# Altium PCB slave.PcbDoc (part 1 of 8)
Units mm, origin at the board's own origin, x right, y up, seen from the top; angles counter-clockwise.
Board outline 160 x 100 mm, 6 copper layers (Top, FUSED_VBAT-, Signals1, Signals2, SUPPLY, Bottom), stack 1.67 mm thick; 582 components, 375 nets, 1615 pads, 3043 vias.
Unrouted connection lines stored in the file: 1.
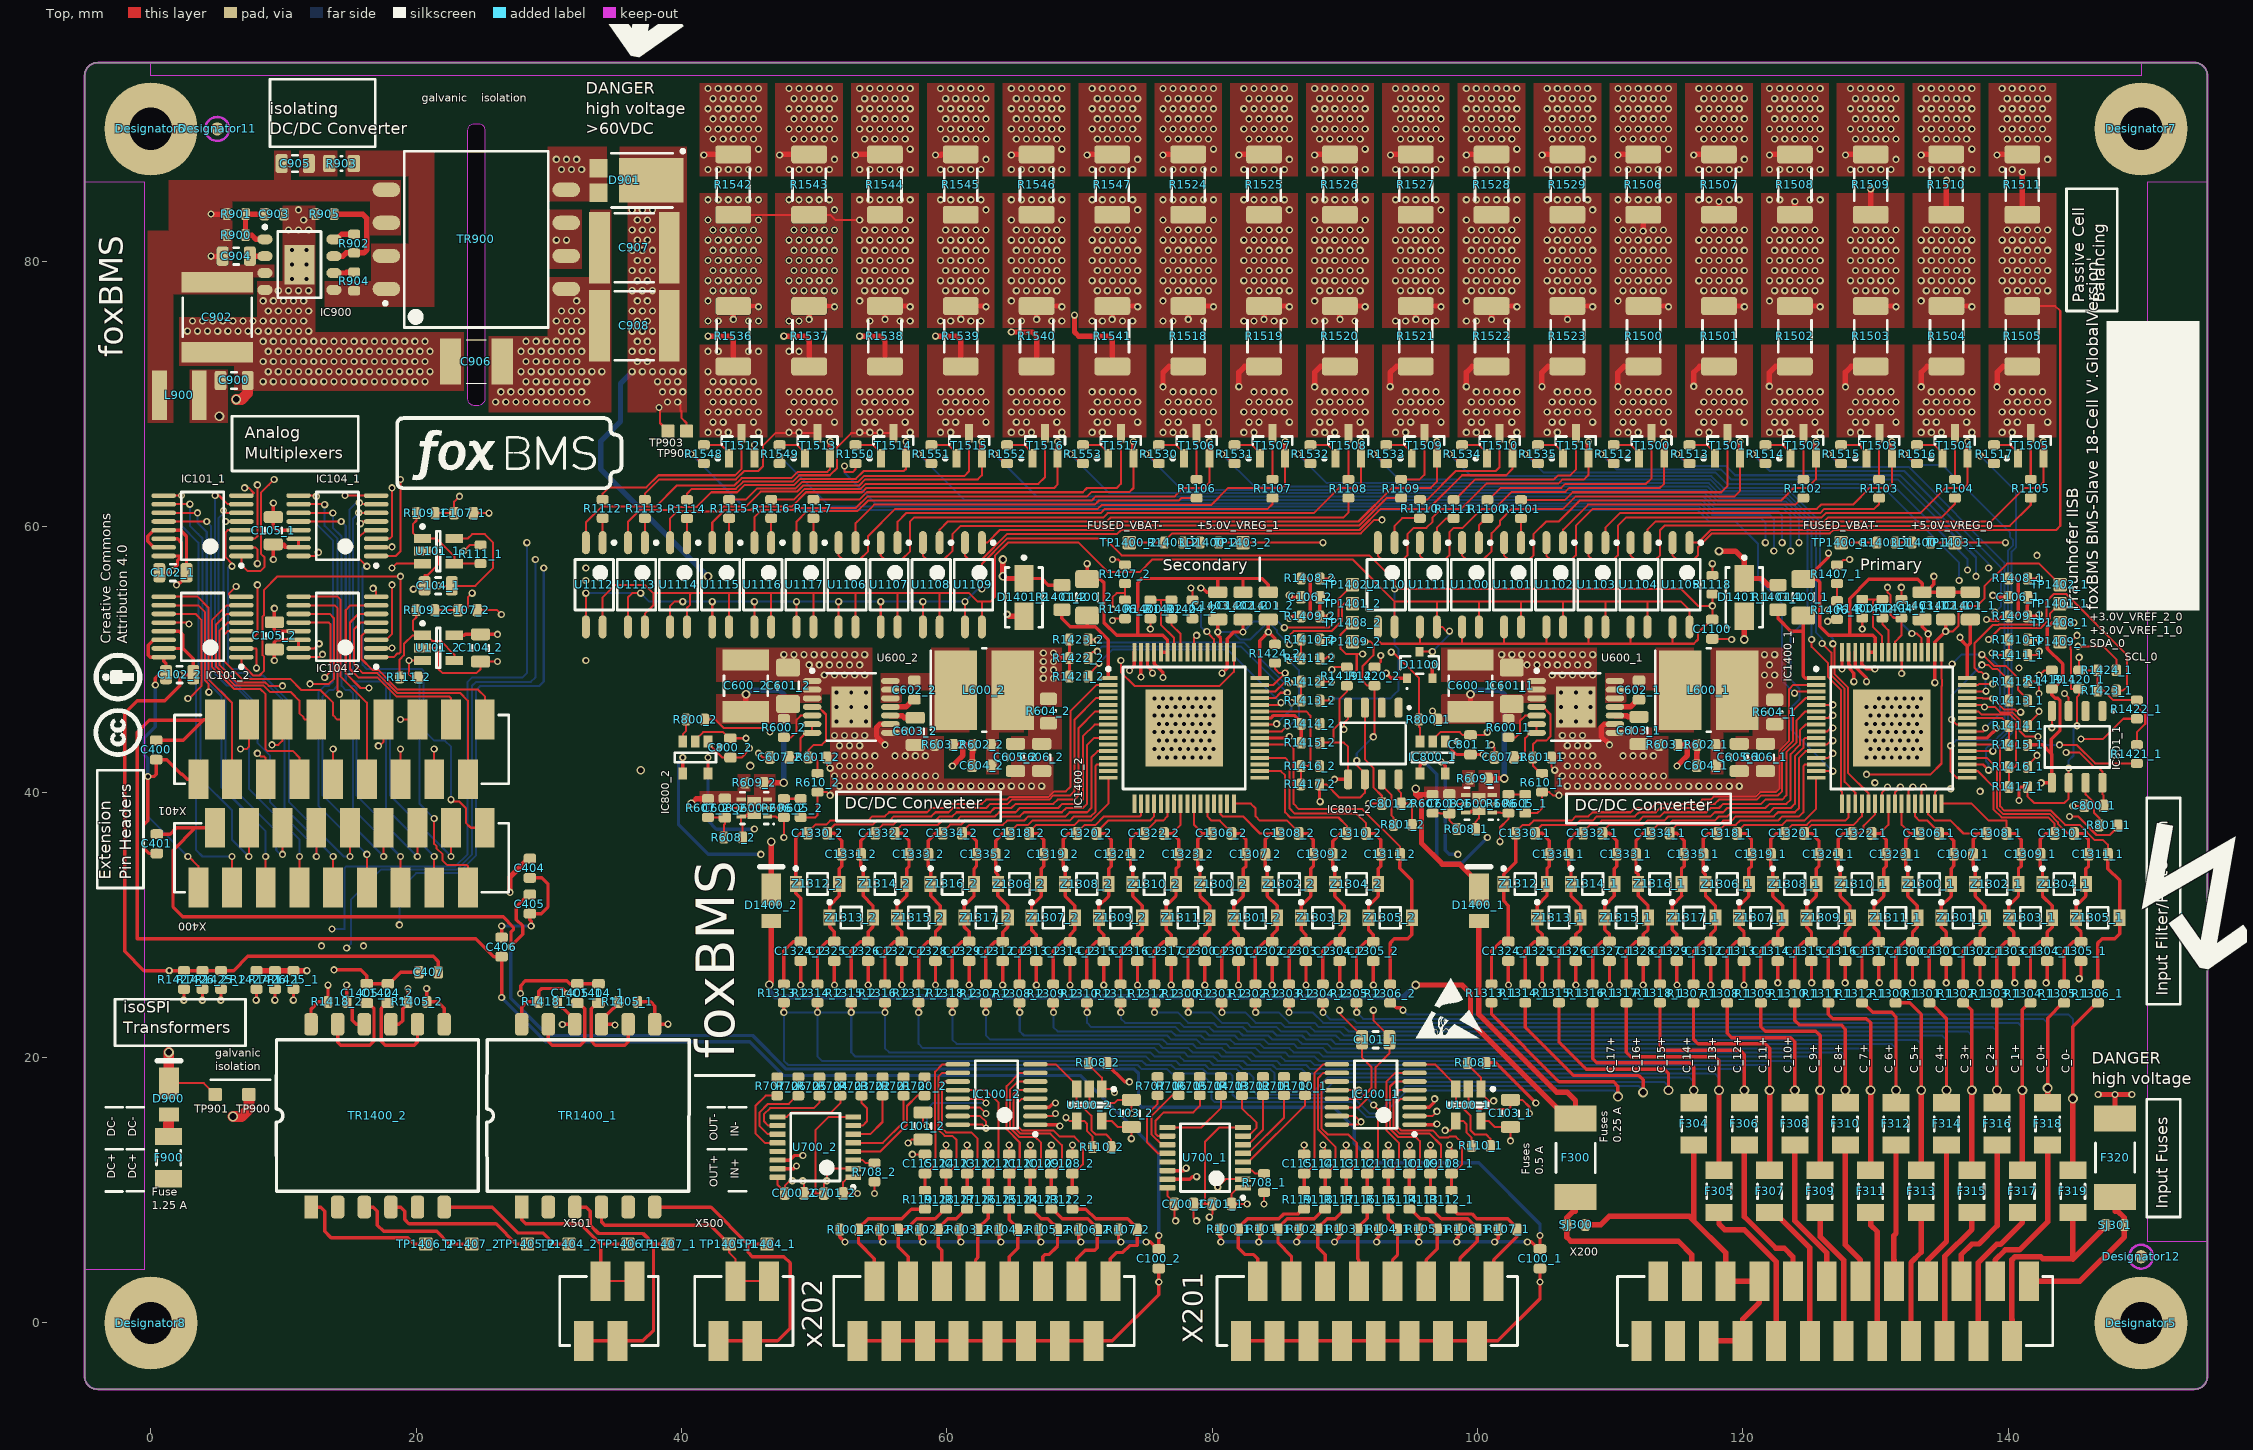
[diagram p0: Top view]
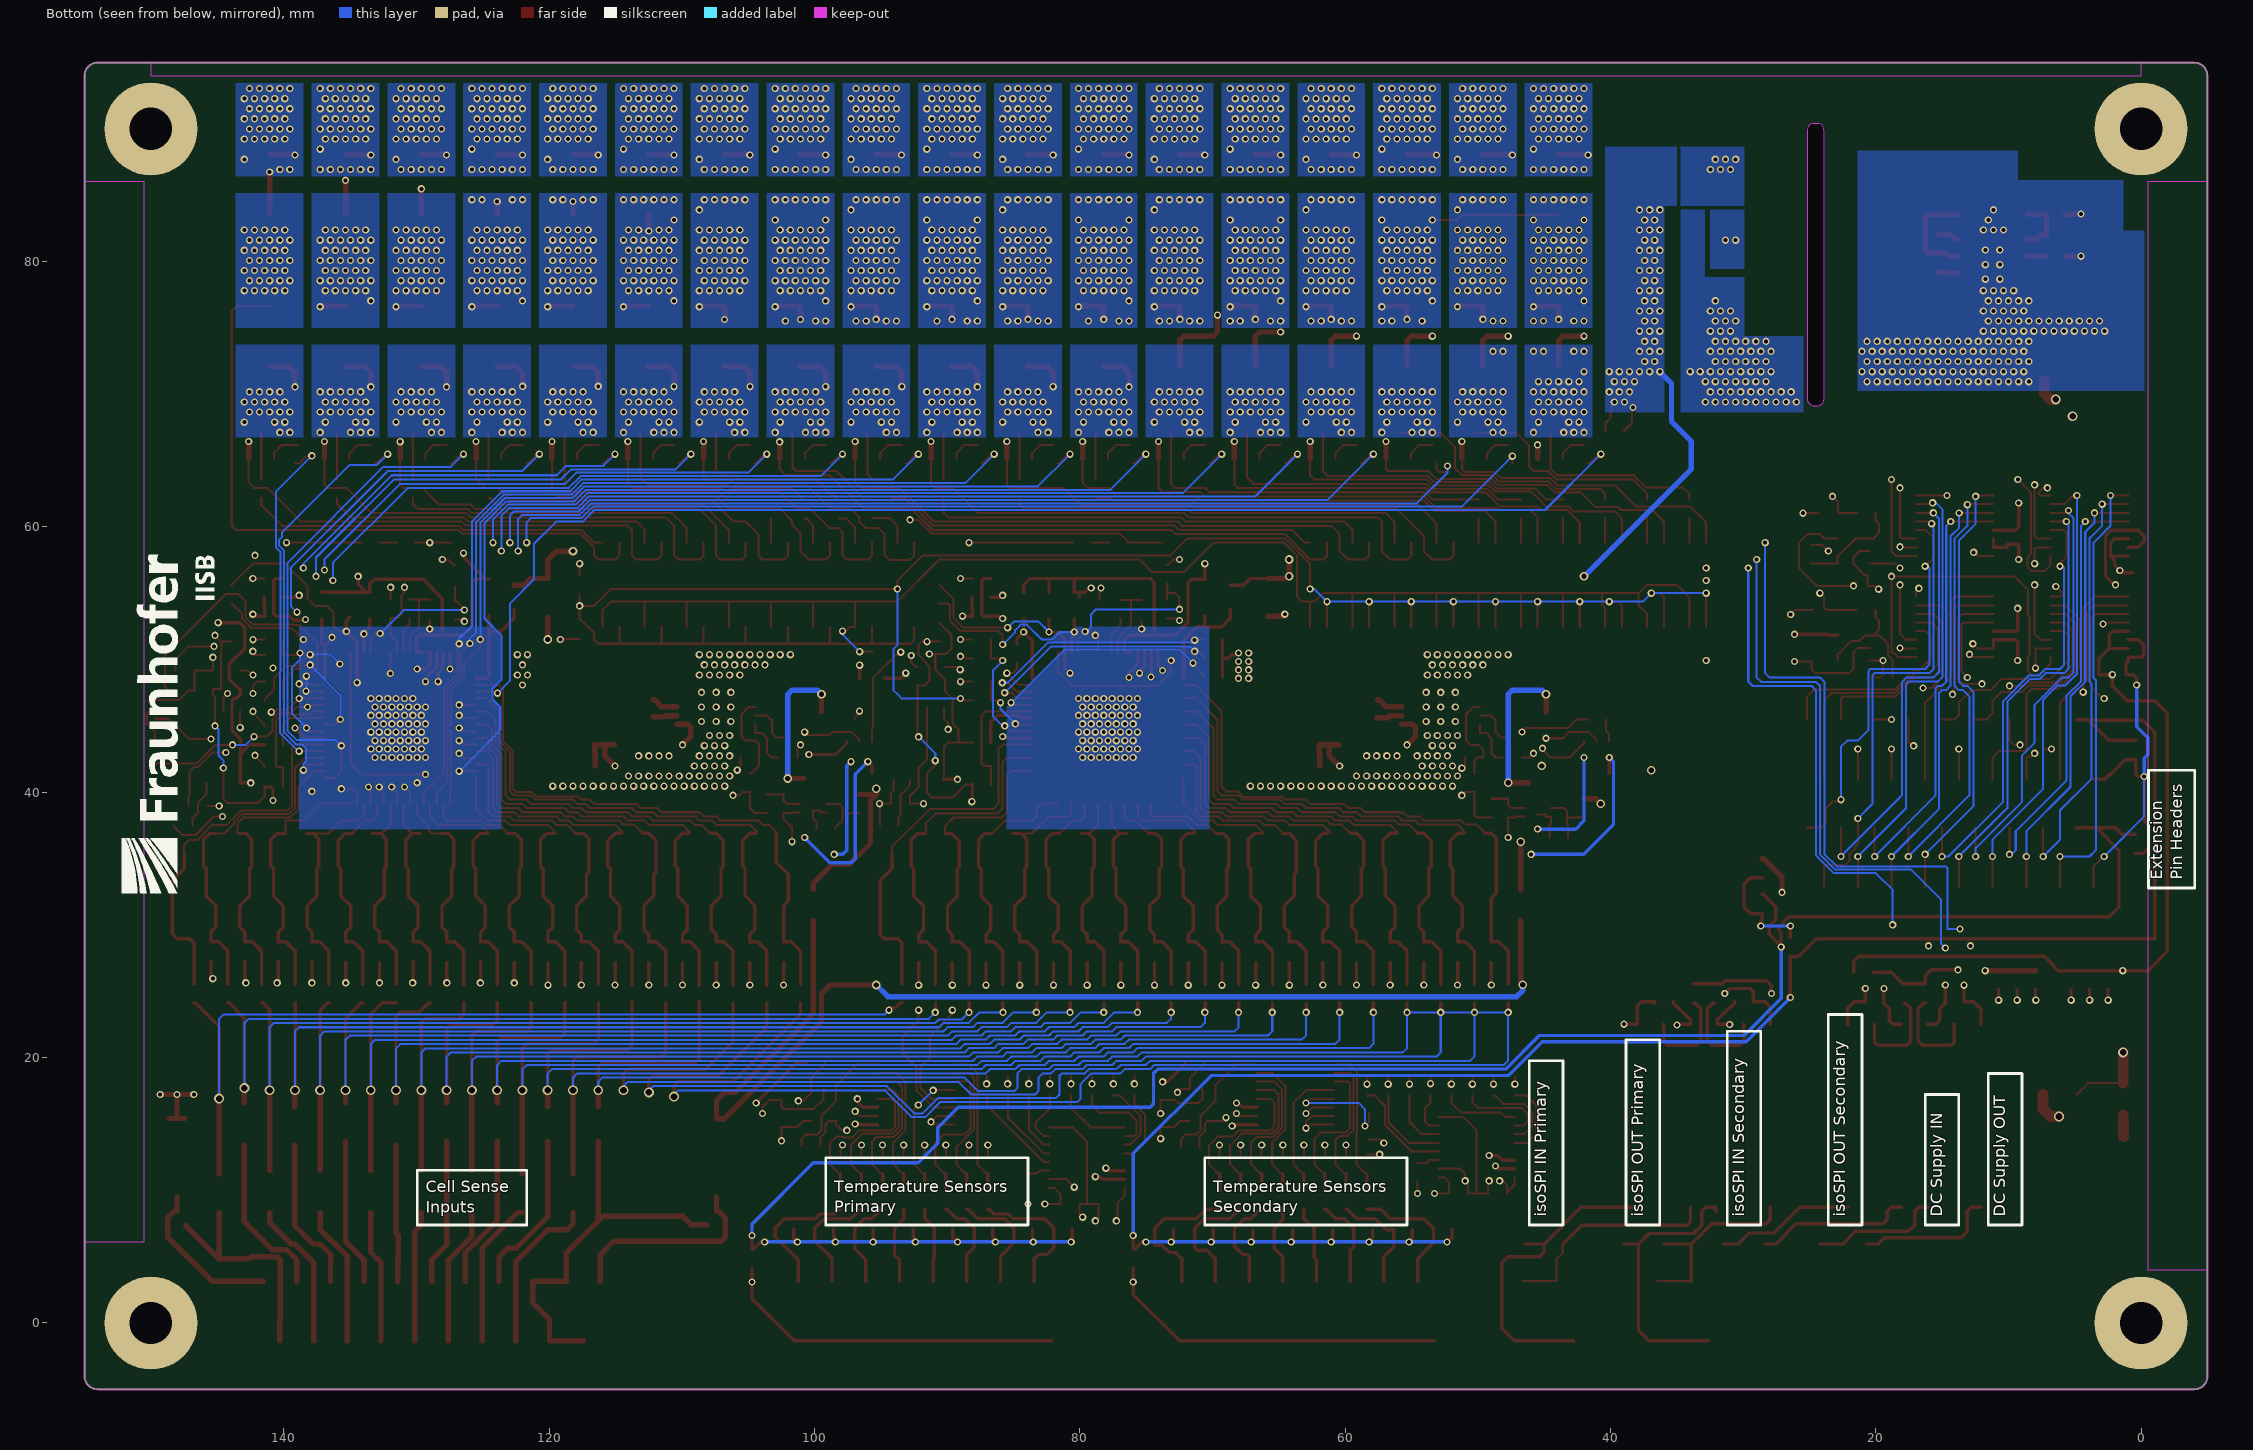
[diagram p1: Bottom view, seen from below]
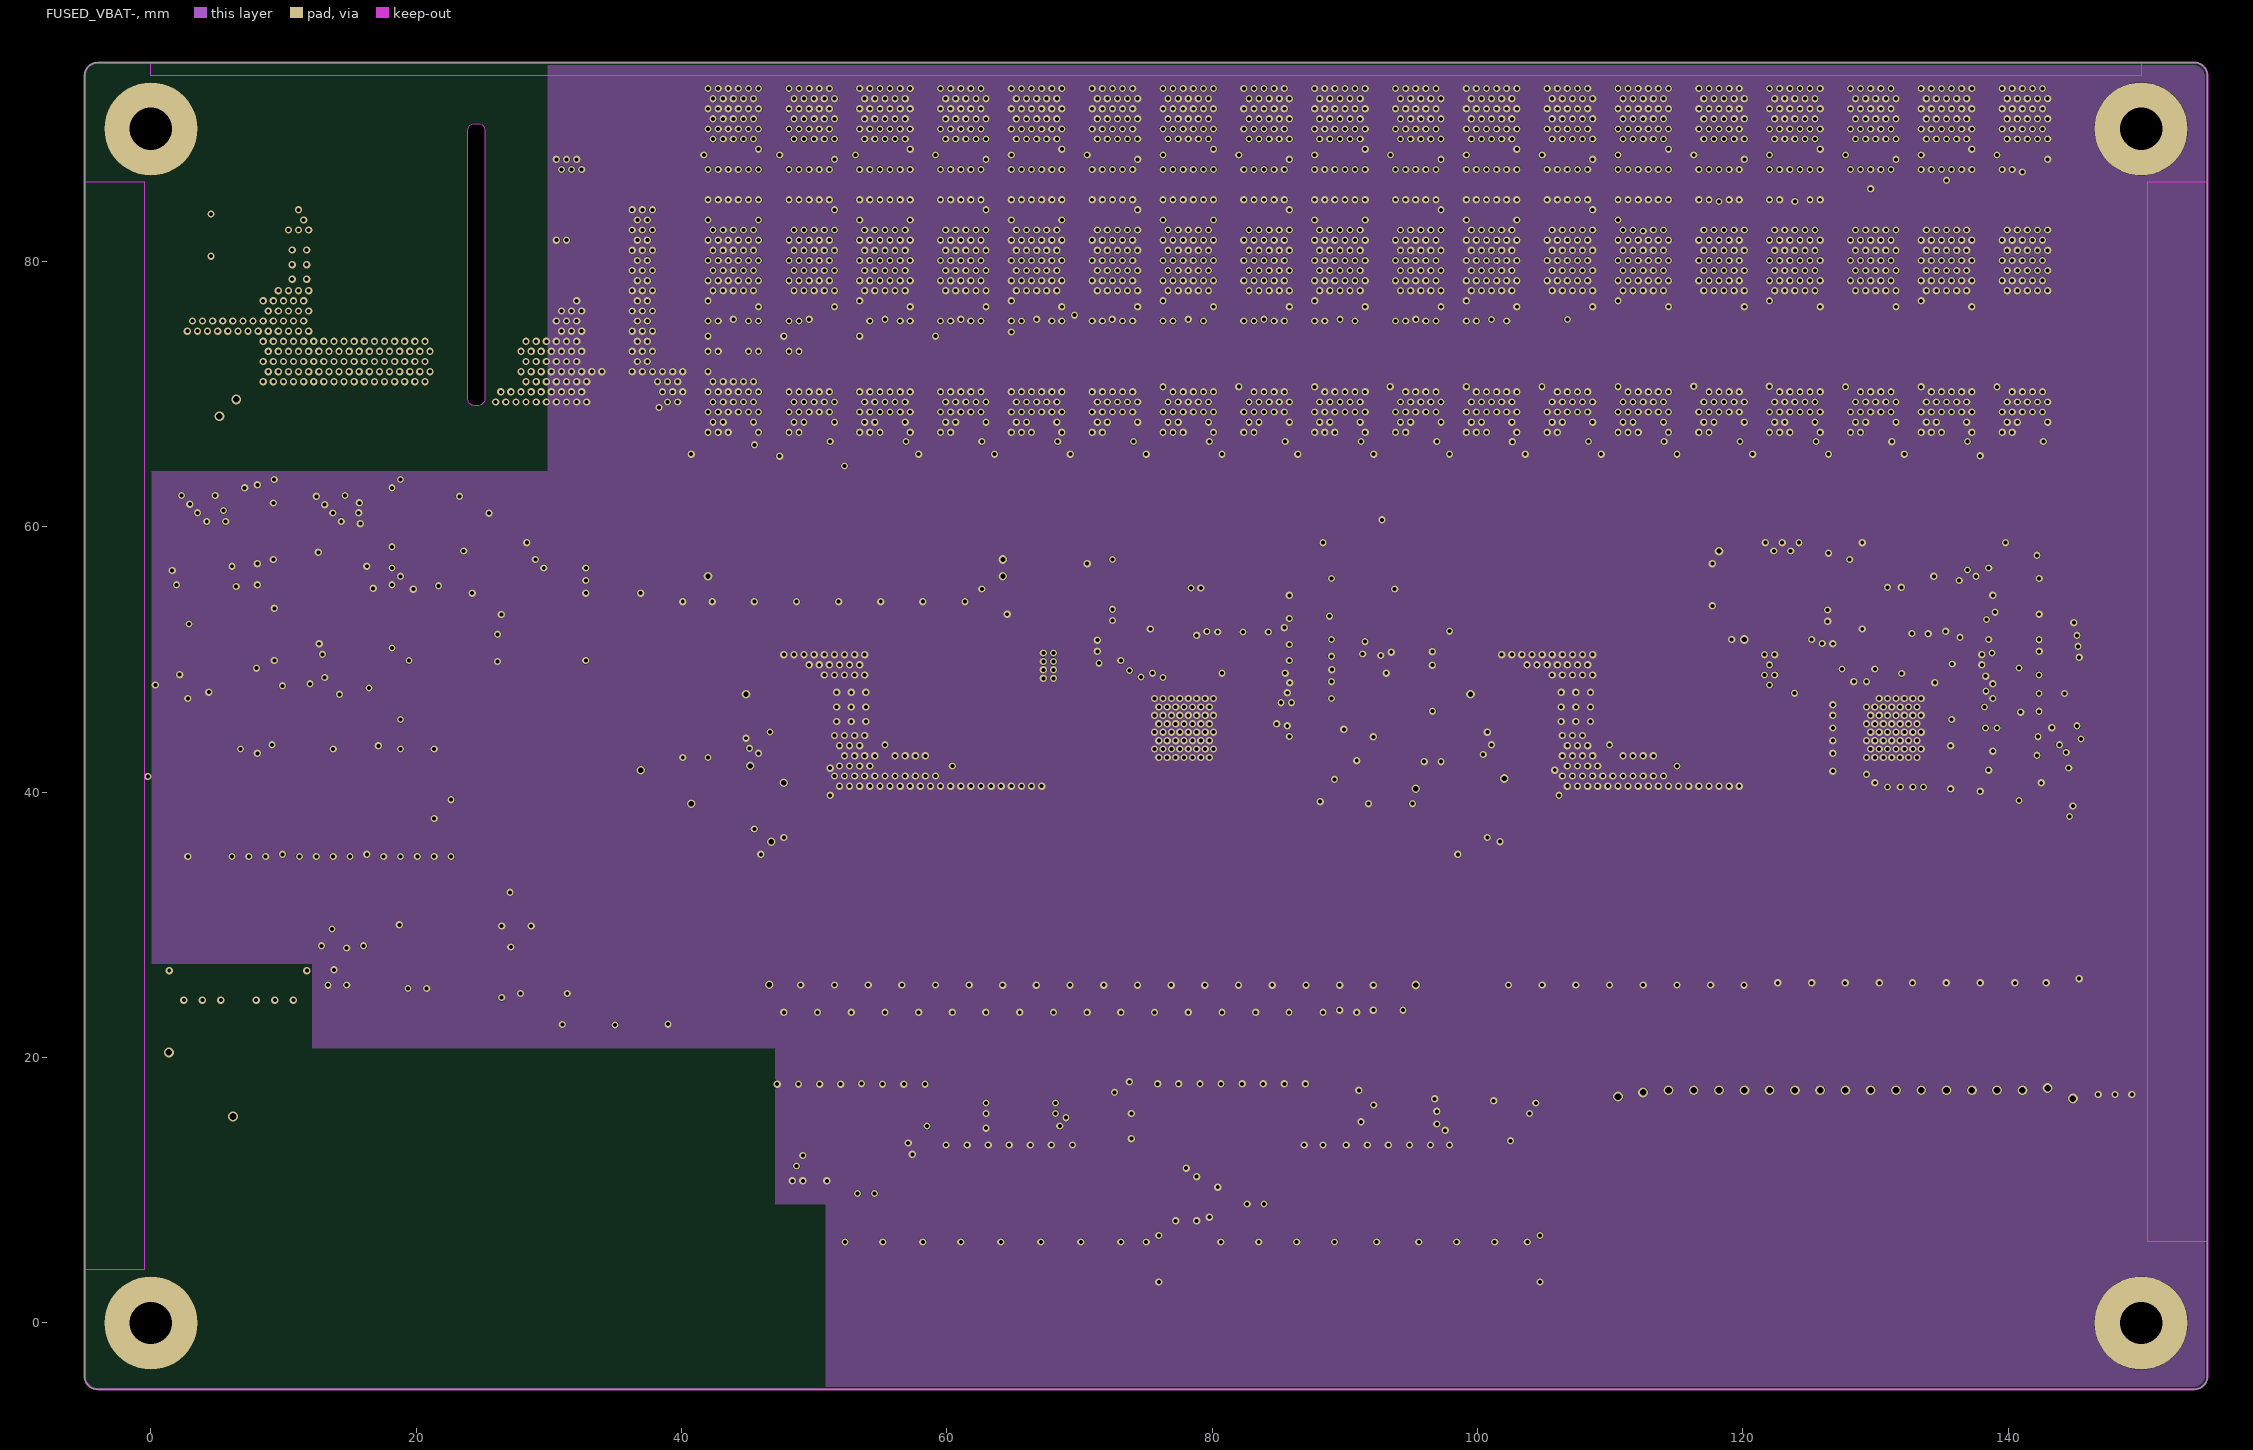
[diagram p2: FUSED_VBAT-]
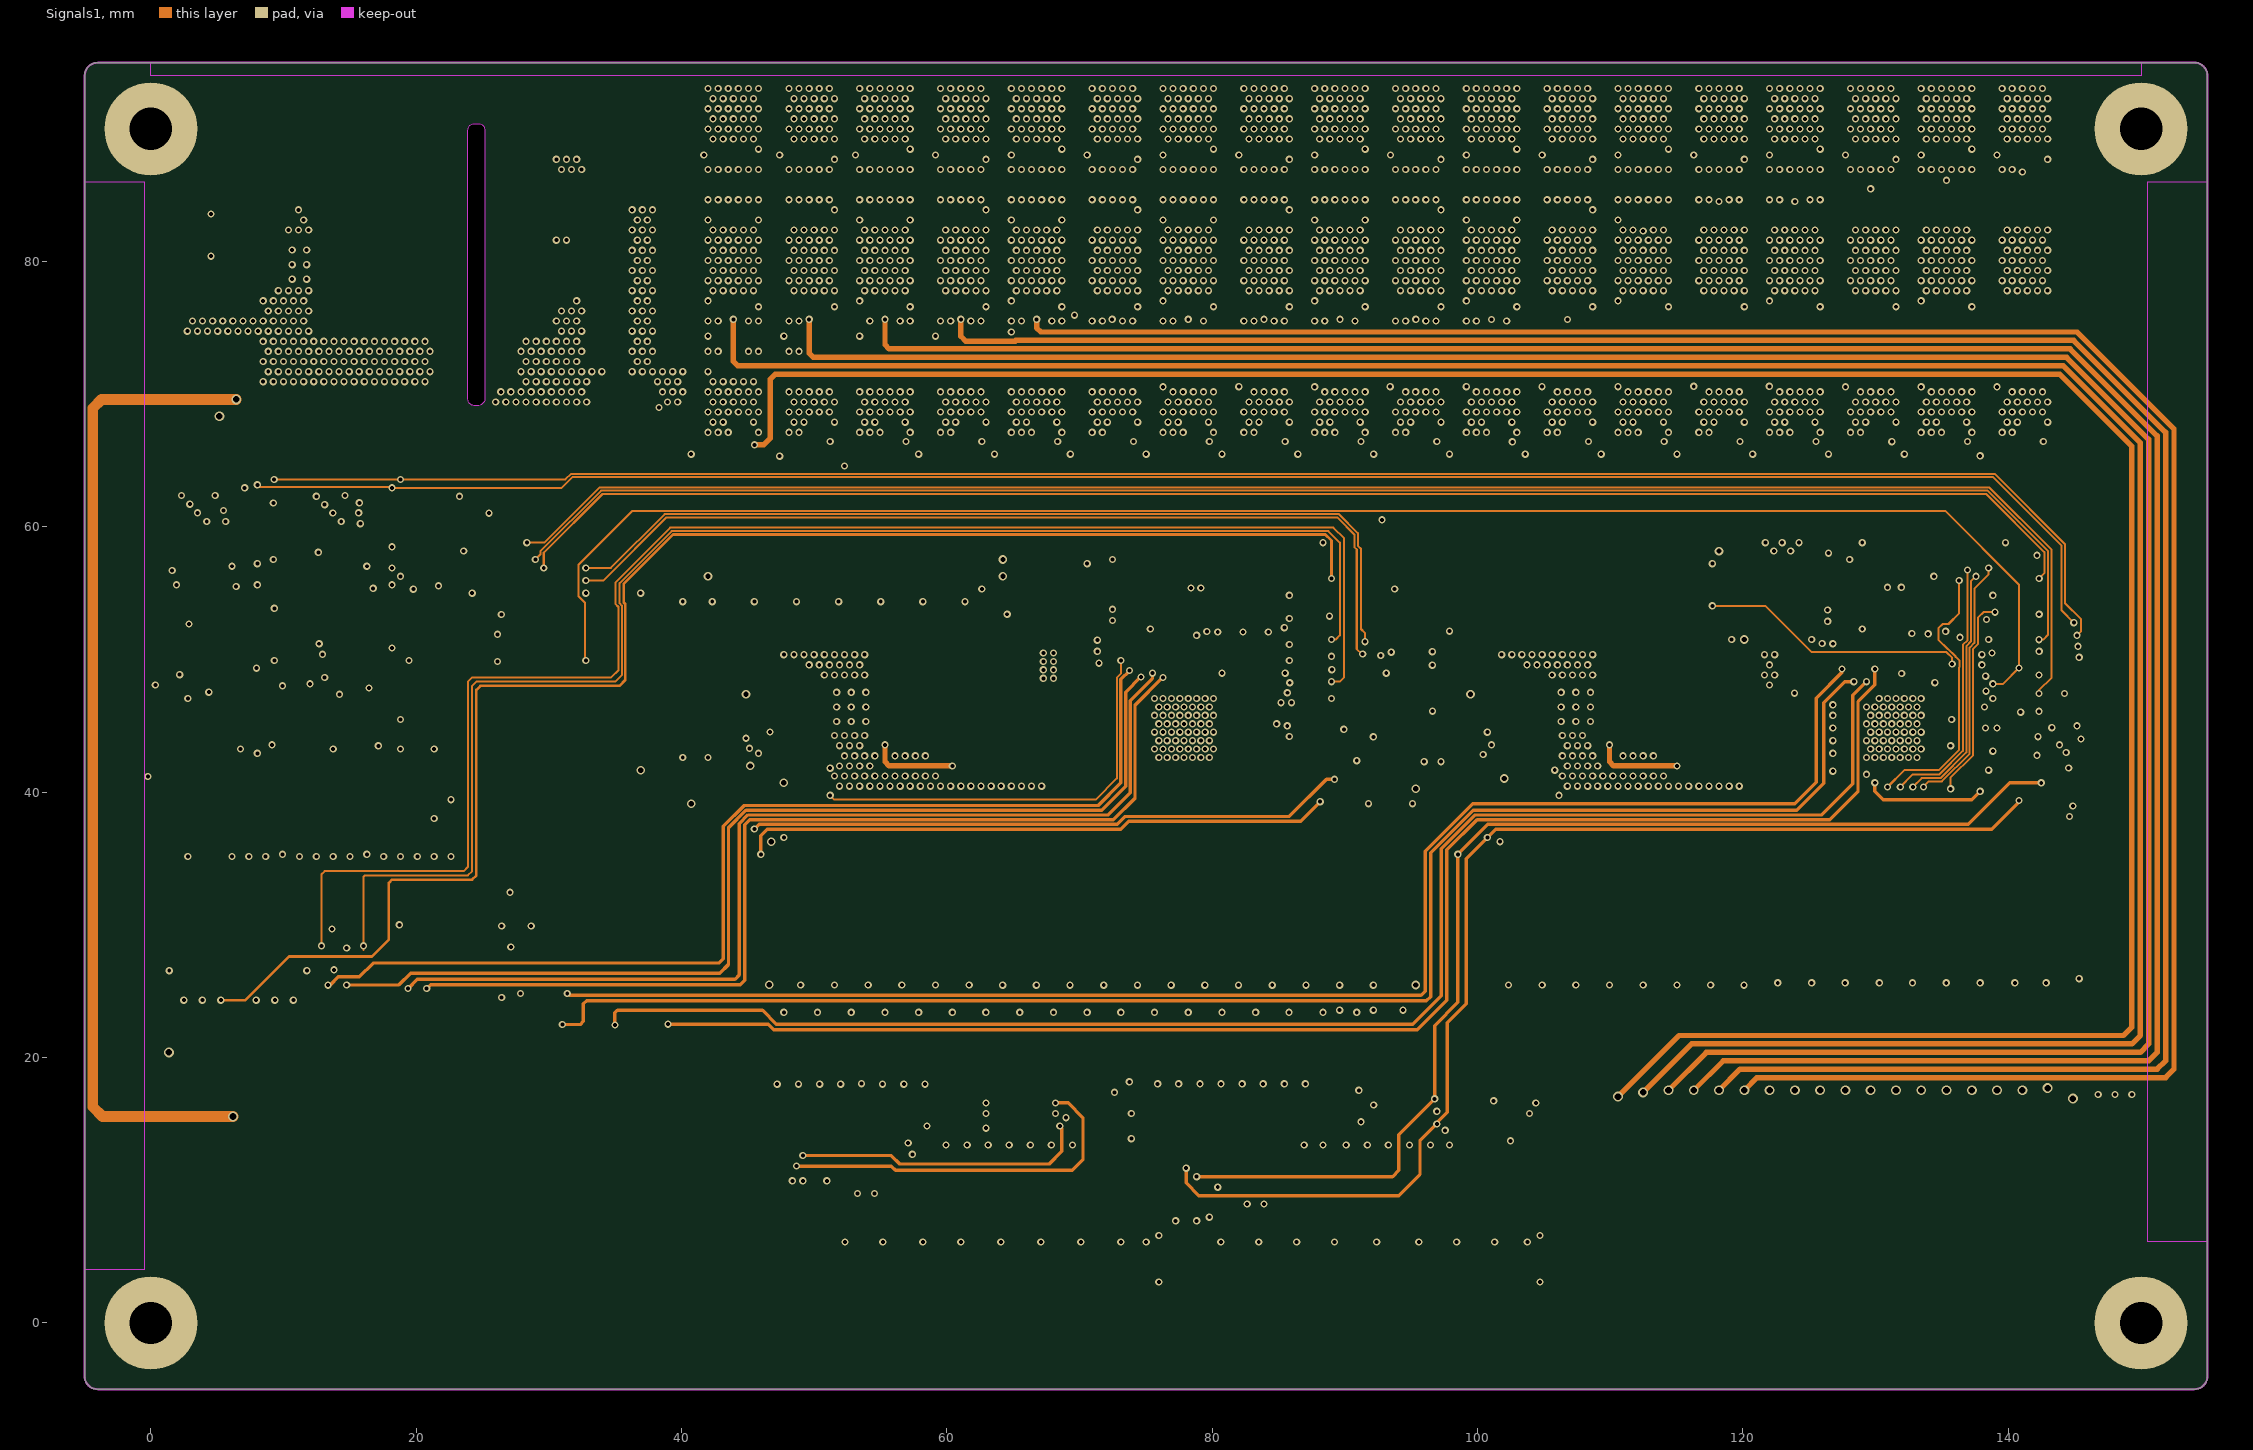
[diagram p3: Signals1]
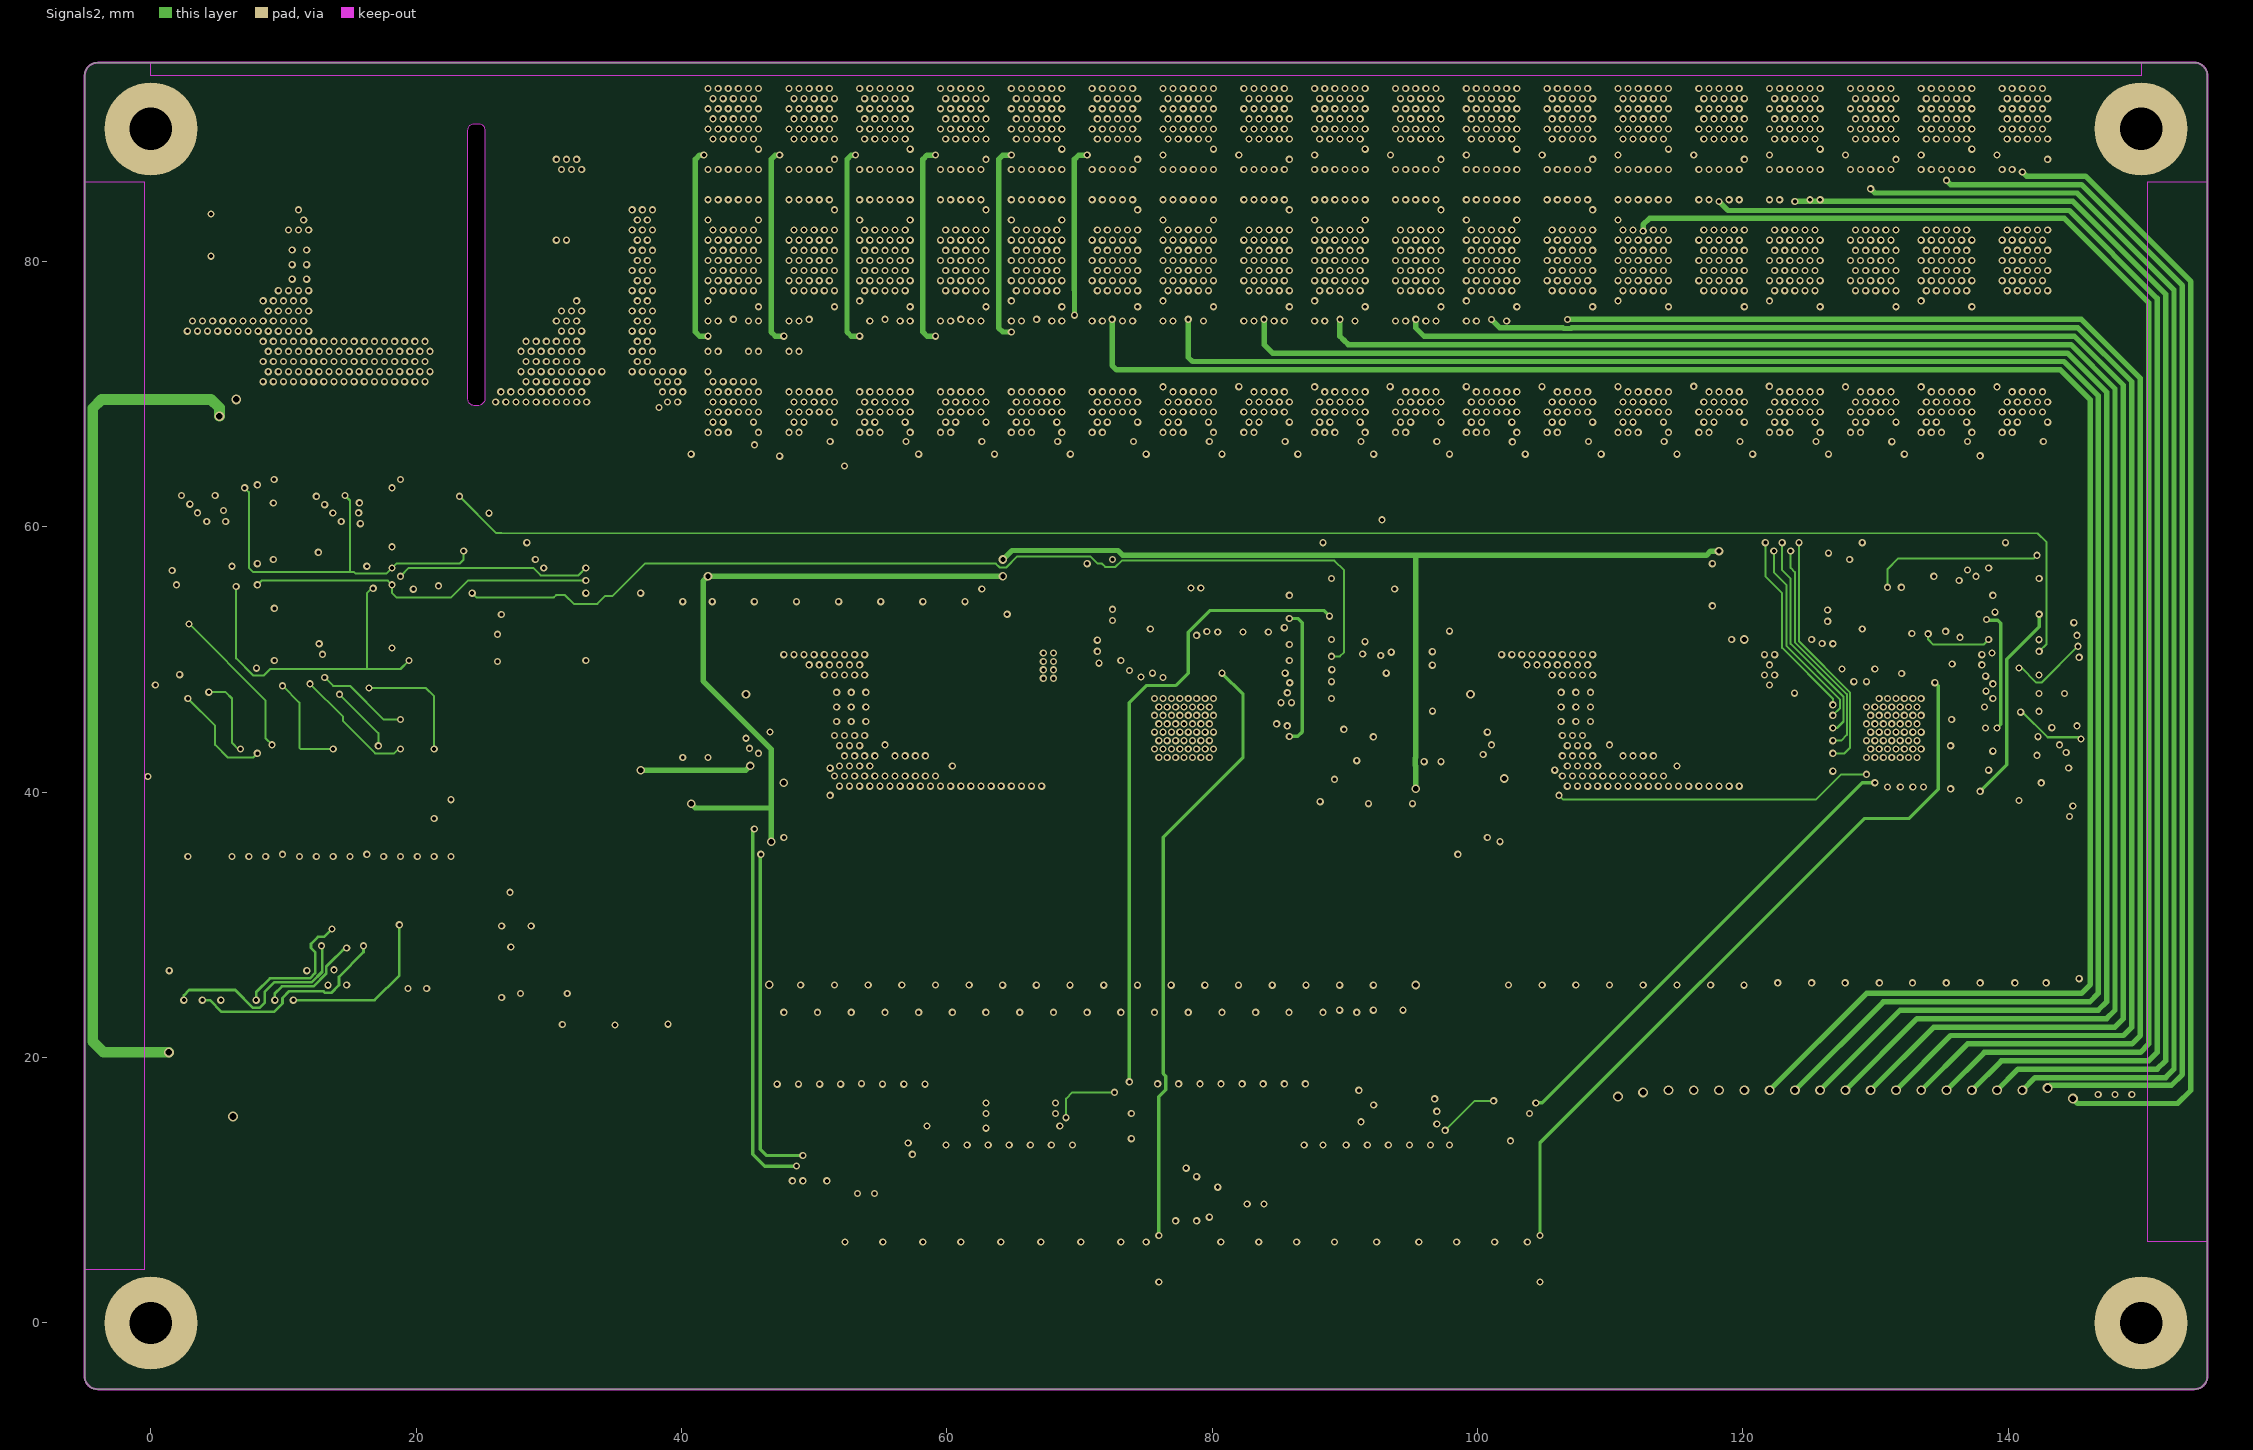
[diagram p4: Signals2]
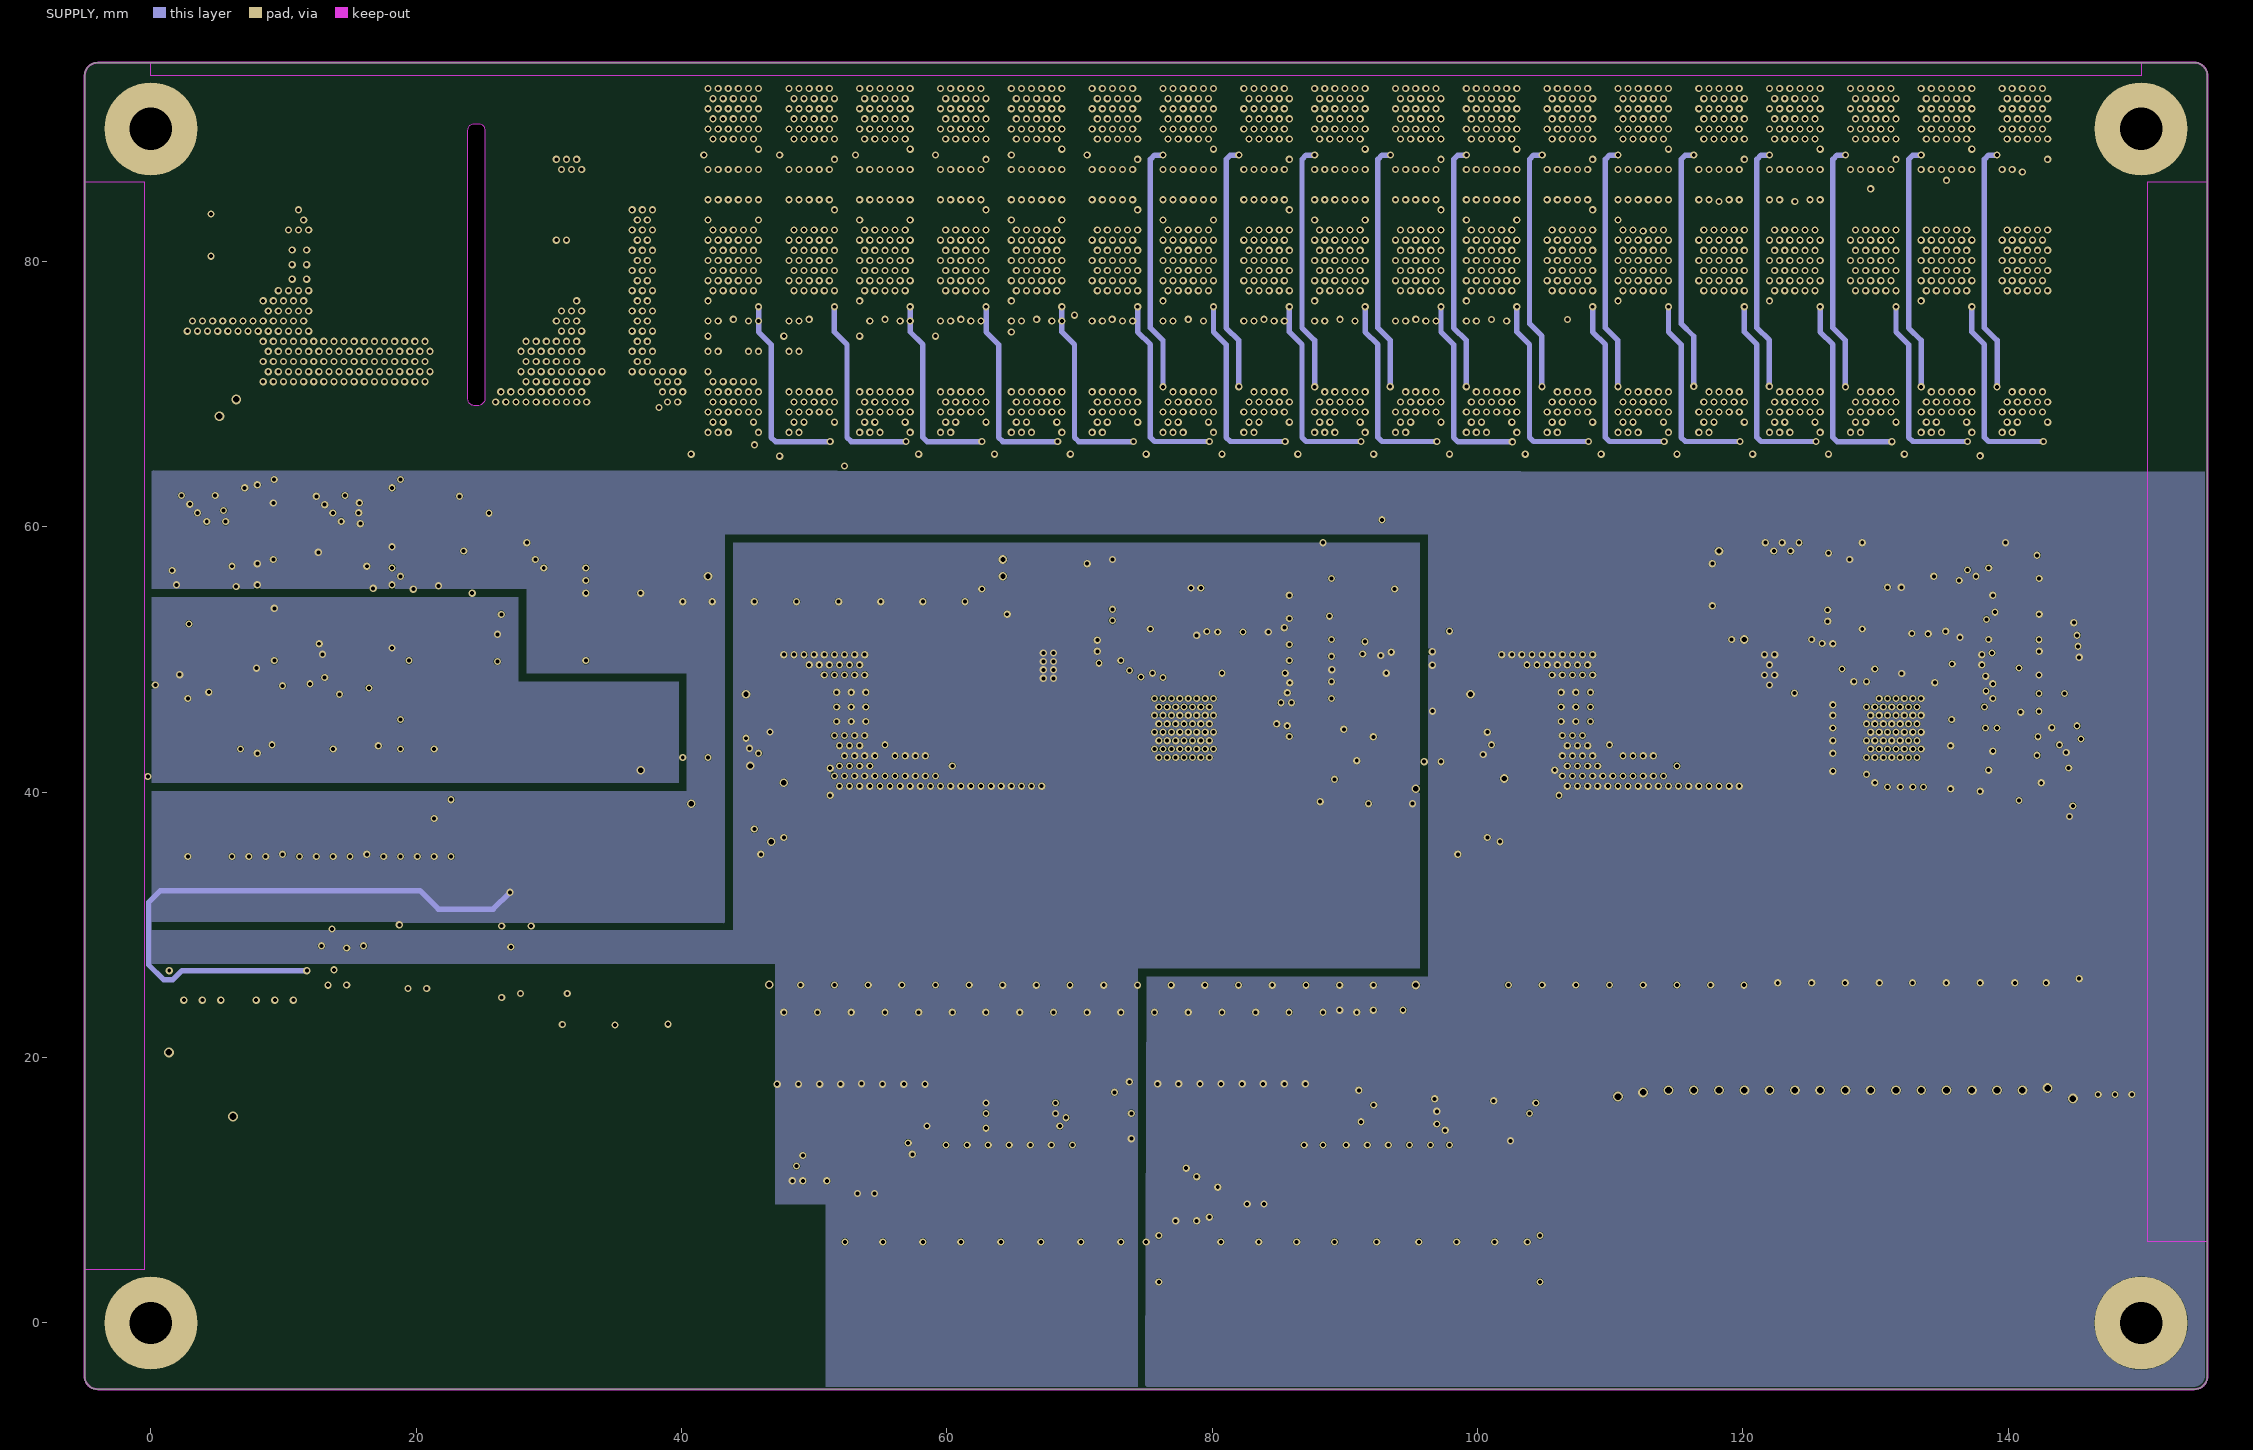
[diagram p5: SUPPLY]

## Layer stack, top to bottom
Top Solder: solder mask 0.015, Solder Resist, Dk 3.5
Top: signal copper 0.035
Dielectric 1: prepreg 0.2, FR-4, Dk 4.2
FUSED_VBAT-: signal copper 0.035
Dielectric2: core 0.35, FR-4, Dk 4.2
Signals1: signal copper 0.035
Dielectric3: prepreg 0.36, FR-4, Dk 4.2
Signals2: signal copper 0.035
Dielectric4: core 0.35, FR-4, Dk 4.2
SUPPLY: signal copper 0.035
Dielectric5: prepreg 0.2, FR-4, Dk 4.2
Bottom: signal copper 0.035
Bottom Solder: solder mask 0.015, Solder Resist, Dk 3.5

## Board outline
-3.994,94.992 154.006,94.992 cw(c154.006,93.992) 155.006,93.992 155.006,-4.008 cw(c154.006,-4.008) 154.006,-5.008 -3.994,-5.008 cw(c-3.994,-4.008) -4.994,-4.008 -4.994,93.992 cw(c-3.994,93.992)
cut-out: 25.168,89.901 25.168,69.628 cw(c24.601,69.696) 24.533,69.128 24.398,69.128 cw(c24.398,69.628) 23.898,69.628 23.898,89.901 cw(c24.398,89.901) 24.398,90.401 24.668,90.401 cw(c24.668,89.901)

## Design rules (kind name [scope] priority, off if disabled: settings)
AssemblyTestPointUsage [All] p1 off:
AssemblyTestpoint [(IsPad And (OnTopLayer Or OnBottomLayer)) Or (IsPad And OnMultiLayer)] p1 off: testpointundercomponent=FALSE minsize=1.016 maxsize=2.54 preferedsize=1.524 minholesize=0 maxholesize=1.016 preferedholesize=0.813 testpointgrid=0.025 usegrid=TRUE gridtolerance=0 allowsidetop=TRUE
BoardOutlineClearance [All] p1: gap=0.203 ignorepadtopadclearanceinfootprint=FALSE except(0.508: Arc-CavityEdge Track-CavityEdge SMDPad-CavityEdge THPad-CavityEdge Via-CavityEdge Fill-CavityEdge Poly-CavityEdge Region-CavityEdge Text-CavityEdge)
Clearance Clearance_1 [All vs OnLayer('FUSED_VBAT-')] p1: gap=0.05 ignorepadtopadclearanceinfootprint=TRUE
Clearance "Stitching FUSED_CELL_10+" [IsStitchingVia and InNet('FUSED_CELL_10+') vs (IsVia and (Not IsStitchingVia)) Or IsPad] p2: gap=0.127 ignorepadtopadclearanceinfootprint=FALSE
FabricationTestpoint [All] p1: side=1 testpointundercomponent=TRUE minsize=0.508 maxsize=7.62 preferedsize=1.524 minholesize=0 maxholesize=1.016 preferedholesize=0.813 testpointgrid=0.025 allowsidetop=TRUE usegrid=FALSE gridtolerance=0
HoleSize [All] p1: absolutevalues=TRUE maxlimit=5.994 minlimit=0.2 maxpercent=80.000 minpercent=20.000
HoleToHoleClearance [All] p1: gap=0.152 allowstackedmicrovias=TRUE
MinimumAnnularRing [All] p1: minimumring=0.102
MinimumSolderMaskSliver [All] p1: minsoldermaskwidth=0.102
PlaneConnect [All] p1: planeconnectstyle=Direct reliefexpansion=0.508 reliefentries=4 reliefconductorwidth=0.254 reliefairgap=0.254
PolygonConnect [All] p1: connectstyle=Direct reliefconductorwidth=0.254 reliefentries=4 polygonreliefangle="90 Angle" airgapwidth=0.254
RoutingVias [All] p1: holewidth=0.203 width=0.45 viastyle="Through Hole" minholewidth=0.203 minwidth=0.45 maxholewidth=1 maxwidth=7 useviatemplates=TRUE viatemplateguid#1={0AB7DAA3-F58E-4780-A6E1-94A16C7095C0} viatemplateguid#2={26AB9DC0-33E3-4C9B-870D-B58389854110} viatemplateguid#3={9A71AE2B-4A20-477F-9082-EC06568001AF} viatemplatename#1=0.3mm_tented viatemplatename#2=0.4mm_tented viatemplatename#3=0.5mm_tented
SMDEntry [All] p1: side=TRUE corner=TRUE anyangle=FALSE
SMDToCorner [All] p1: distance=40000
SilkToSolderMaskClearance [IsPad] p1: minsilkscreentomaskgap=0.102 clearancetoexposedcopper=FALSE
SolderMaskExpansion SolderMaskExpansion_VIAs [IsVia] p1: expansion=-10 istentingtop=FALSE // Cover all Vias
SolderMaskExpansion [All] p2: expansion=0.051 istentingtop=FALSE
SupplyNets "Schematic Supply Nets_7" [InNet('VBAT+')] p1: voltage=0.000
SupplyNets "Schematic Supply Nets_6" [InNet('+3.0V_VREF2_2')] p2: voltage=0.000
SupplyNets "Schematic Supply Nets_5" [InNet('+3.0V_VREF2_1')] p3: voltage=0.000
SupplyNets "Schematic Supply Nets_4" [InNet('FUSED_VBAT-')] p4: voltage=0.000
SupplyNets "Schematic Supply Nets_3" [InNet('+5.0V_VREG_1')] p5: voltage=0.000
SupplyNets "Schematic Supply Nets_2" [InNet('+5.0V_VREG_2')] p6: voltage=0.000
SupplyNets "Schematic Supply Nets_1" [InNet('FUSED_VBAT+')] p7: voltage=0.000
SupplyNets "Schematic Supply Nets" [InNet('VBAT-')] p8: voltage=0.000
UnRoutedNet [All] p1: checkbadconnections=TRUE
UnpouredPolygon UnpouredPolygon_1 [All] p1:
Width [All] p1: maxlimit=1.524 minlimit=0.102 preferedwidth=0.152
20 further rules are at their usual default settings.

## Classes and differential pairs
channel class dcdc_converter: U_primary_dcdc_converter U_secondary_dcdc_converter
channel class eeprom_temp_sens: U_primary_eeprom_temp_sens U_secondary_eeprom_temp_sens
channel class digital_io: U_primary_digital_io U_secondary_digital_io
channel class analog_in: U_primary_analog_in U_secondary_analog_in
channel class LTC: U_primary_LTC U_secondary_LTC
channel class input_filter: U_primary_input_filter U_secondary_input_filter
polygon class PolygonThermal_ON_Width60000_Gap78740: Polygon_1_Net_+5.0V_VREG_1
polygon class Isolate_10: Polygon_1_Net_+5.0V_VREG_1
pad class SMDPaste_OFF: IC201-P$1 IC301-P$1

## Components (designator, comment, footprint, x,y, rotation, side; value= is the part's Value field where it differs from the comment)
C100_1 "100n/50V" CAPC1608X08N 104.702,4.835 r90 top (schematic designator C100)
C100_2 "100n/50V" CAPC1608X08N 75.968,4.835 r90 top (schematic designator C100)
C101_1 "1u/50V" CAPC2012X14N 92.32,21.345 r180 top (schematic designator C101)
C101_2 "1u/50V" CAPC2012X14N 58.188,14.836 r90 top (schematic designator C101)
C102_1 "1u/50V" CAPC2012X14N 1.661,56.544 r0 top (schematic designator C102)
C102_2 "1u/50V" CAPC2012X14N 2.172,48.86 r0 top (schematic designator C102)
C103_1 "1u/50V" CAPC2012X14N 102.48,15.788 r270 top (schematic designator C103)
C103_2 "1u/50V" CAPC2012X14N 73.905,15.788 r270 top (schematic designator C103)
C104_1 "1u/50V" CAPC2012X14N 21.656,55.559 r0 top (schematic designator C104)
C104_2 "1u/50V" CAPC2012X14N 24.851,50.872 r90 top (schematic designator C104)
C105_1 "1u/50V" CAPC2012X14N 9.23,59.71 r90 top (schematic designator C105)
C105_2 "1u/50V" CAPC2012X14N 9.311,51.785 r90 top (schematic designator C105)
C106_1 "10n/100V" CAPC1608X08N 140.738,54.682 r0 top (schematic designator C106)
C106_2 "10n/100V" CAPC1608X08N 87.398,54.682 r0 top (schematic designator C106)
C107_1 "10n/100V" CAPC1608X08N 23.581,61.032 r180 top (schematic designator C107)
C107_2 "10n/100V" CAPC1608X08N 23.878,53.717 r180 top (schematic designator C107)
C108_1 "10n/100V" CAPC1608X08N 98.035,11.978 r270 top (schematic designator C108)
C108_2 "10n/100V" CAPC1608X08N 69.46,11.978 r270 top (schematic designator C108)
C109_1 "10n/100V" CAPC1608X08N 96.447,11.978 r270 top (schematic designator C109)
C109_2 "10n/100V" CAPC1608X08N 67.872,11.978 r270 top (schematic designator C109)
C110_1 "10n/100V" CAPC1608X08N 94.86,11.978 r270 top (schematic designator C110)
C110_2 "10n/100V" CAPC1608X08N 66.285,11.978 r270 top (schematic designator C110)
C111_1 "10n/100V" CAPC1608X08N 93.272,11.978 r270 top (schematic designator C111)
C111_2 "10n/100V" CAPC1608X08N 64.697,11.978 r270 top (schematic designator C111)
C112_1 "10n/100V" CAPC1608X08N 91.685,11.978 r270 top (schematic designator C112)
C112_2 "10n/100V" CAPC1608X08N 63.11,11.978 r270 top (schematic designator C112)
C113_1 "10n/100V" CAPC1608X08N 90.097,11.978 r270 top (schematic designator C113)
C113_2 "10n/100V" CAPC1608X08N 61.522,11.978 r270 top (schematic designator C113)
C114_1 "10n/100V" CAPC1608X08N 88.51,11.978 r270 top (schematic designator C114)
C114_2 "10n/100V" CAPC1608X08N 59.935,11.978 r270 top (schematic designator C114)
C115_1 "10n/100V" CAPC1608X08N 86.922,11.978 r270 top (schematic designator C115)
C115_2 "10n/100V" CAPC1608X08N 58.347,11.978 r270 top (schematic designator C115)
C400 "100n/50V" CAPC1608X08N 0.403,43.183 r90 top
C401 "100n/50V" CAPC1608X08N 0.448,36.108 r90 top
C404 "100n/50V" CAPC1608X08N 28.571,34.272 r90 top
C405 "100n/50V" CAPC1608X08N 28.571,31.573 r90 top
C406 "100n/50V" CAPC1608X08N 26.438,28.33 r270 top
C407 "100n/50V" CAPC1608X08N 20.931,26.425 r0 top
C600_1 "1u/250V" CAPC4532X16N 99.463,48.015 r270 top (schematic designator C600)
C600_2 "1u/250V" CAPC4532X16N 44.853,48.015 r270 top (schematic designator C600)
C601_1 "100n/200V" CAPC3216X18N 102.575,48.015 r270 top (schematic designator C601)
C601_2 "100n/200V" CAPC3216X18N 48.028,48.015 r270 top (schematic designator C601)
C602_1 "100n/50V" CAPC1608X08N 112.163,47.697 r270 top locked (schematic designator C602)
C602_2 "100n/50V" CAPC1608X08N 57.553,47.697 r270 top locked (schematic designator C602)
C603_1 "1u/50V" CAPC2012X14N 112.163,44.649 r90 top locked (schematic designator C603)
C603_2 "1u/50V" CAPC2012X14N 57.617,44.586 r90 top locked (schematic designator C603)
C604_1 "100n/50V" CAPC1608X08N 117.243,41.982 r0 top (schematic designator C604)
C604_2 "100n/50V" CAPC1608X08N 62.633,41.982 r0 top (schematic designator C604)
C605_1 "2u2/10V" CAPC2012X14N 119.72,42.617 r90 top (schematic designator C605)
C605_2 "2u2/10V" CAPC2012X14N 65.173,42.617 r90 top (schematic designator C605)
C606_1 "2u2/10V" CAPC2012X14N 121.688,42.617 r90 top (schematic designator C606)
C606_2 "2u2/10V" CAPC2012X14N 67.142,42.617 r90 top (schematic designator C606)
C607_1 "100n/50V" CAPC1608X08N 102.003,42.617 r180 top locked (schematic designator C607)
C607_2 "100n/50V" CAPC1608X08N 47.393,42.617 r180 top locked (schematic designator C607)
C608_1 "10n/100V" CAPC1608X08N 97.876,39.125 r270 top (schematic designator C608)
C608_2 "10n/100V" CAPC1608X08N 43.266,38.807 r270 top (schematic designator C608)
C700_1 "100n/50V" CAPC1608X08N 77.873,8.962 r180 top locked (schematic designator C700)
C700_2 "100n/50V" CAPC1608X08N 48.505,9.756 r180 top (schematic designator C700)
C701_1 "100n/50V" CAPC1608X08N 80.731,8.962 r0 top (schematic designator C701)
C701_2 "100n/50V" CAPC1608X08N 51.461,9.756 r0 top (schematic designator C701)
C800_1 "100n/50V" CAPC1608X08N 146.453,38.966 r0 top (schematic designator C800)
C800_2 "100n/50V" CAPC1608X08N 43.683,43.342 r270 top (schematic designator C800)
C801_1 "100n/50V" CAPC1608X08N 99.463,43.57 r270 top (schematic designator C801)
C801_2 "100n/50V" CAPC1608X08N 93.516,39.14 r0 top (schematic designator C801)
C900 "1u/50V" CAPC2012X14N 6.277,71.033 r180 top
C902 "22u/50V" CAPC2220(5750)230_N 5.007,75.796 r90 top
C903 "100n/50V" CAPC1608X08N 9.293,83.575 r180 top
C904 "1u/50V" CAPC2012X14N 6.436,80.4 r0 top
C905 "470p/100V" CAPC2012X14N 10.881,87.385 r180 top
C906 "4n7/1000V" CAPC4532X16N 24.533,72.462 r0 top locked
C907 "2u2/250V" CAPC2220(5750)230_N 36.44,81.035 r0 top locked
C908 "2u2/250V" CAPC2220(5750)230_N 36.44,75.161 r0 top locked
C1100 "100n/50V" CAPC1608X08N 117.693,52.283 r90 top
C1300_1 "10n/100V" CAPC1608X08N 132.781,28 r270 top (schematic designator C1300)
C1300_2 "10n/100V" CAPC1608X08N 79.441,28 r270 top (schematic designator C1300)
C1301_1 "10n/100V" CAPC1608X08N 135.321,28 r270 top (schematic designator C1301)
C1301_2 "10n/100V" CAPC1608X08N 81.981,28 r270 top (schematic designator C1301)
C1302_1 "10n/100V" CAPC1608X08N 137.861,28 r270 top (schematic designator C1302)
C1302_2 "10n/100V" CAPC1608X08N 84.521,28 r270 top (schematic designator C1302)
C1303_1 "10n/100V" CAPC1608X08N 140.401,28 r270 top (schematic designator C1303)
C1303_2 "10n/100V" CAPC1608X08N 87.061,28 r270 top (schematic designator C1303)
C1304_1 "10n/100V" CAPC1608X08N 142.941,28 r270 top (schematic designator C1304)
C1304_2 "10n/100V" CAPC1608X08N 89.601,28 r270 top (schematic designator C1304)
C1305_1 "10n/100V" CAPC1608X08N 145.481,28 r270 top (schematic designator C1305)
C1305_2 "10n/100V" CAPC1608X08N 92.141,28 r270 top (schematic designator C1305)
C1306_1 "10n/100V" CAPC1608X08N 134.051,36.89 r0 top (schematic designator C1306)
C1306_2 "10n/100V" CAPC1608X08N 80.711,36.89 r0 top (schematic designator C1306)
C1307_1 "10n/100V" CAPC1608X08N 136.623,35.315 r0 top (schematic designator C1307)
C1307_2 "10n/100V" CAPC1608X08N 83.271,35.315 r0 top (schematic designator C1307)
C1308_1 "10n/100V" CAPC1608X08N 139.131,36.89 r0 top (schematic designator C1308)
C1308_2 "10n/100V" CAPC1608X08N 85.791,36.89 r0 top (schematic designator C1308)
C1309_1 "10n/100V" CAPC1608X08N 141.691,35.315 r0 top (schematic designator C1309)
C1309_2 "10n/100V" CAPC1608X08N 88.351,35.315 r0 top (schematic designator C1309)
C1310_1 "10n/100V" CAPC1608X08N 144.211,36.89 r0 top (schematic designator C1310)
C1310_2 "10n/100V" CAPC1608X08N 90.871,36.89 r0 top (schematic designator C1310)
C1311_1 "10n/100V" CAPC1608X08N 146.771,35.315 r0 top (schematic designator C1311)
C1311_2 "10n/100V" CAPC1608X08N 93.431,35.315 r0 top (schematic designator C1311)
C1312_1 "10n/100V" CAPC1608X08N 117.561,28.012 r270 top (schematic designator C1312)
C1312_2 "10n/100V" CAPC1608X08N 64.201,28 r270 top (schematic designator C1312)
C1313_1 "10n/100V" CAPC1608X08N 120.081,28 r270 top (schematic designator C1313)
C1313_2 "10n/100V" CAPC1608X08N 66.741,28 r270 top (schematic designator C1313)
C1314_1 "10n/100V" CAPC1608X08N 122.621,28 r270 top (schematic designator C1314)
C1314_2 "10n/100V" CAPC1608X08N 69.281,28 r270 top (schematic designator C1314)
C1315_1 "10n/100V" CAPC1608X08N 125.161,28 r270 top (schematic designator C1315)
C1315_2 "10n/100V" CAPC1608X08N 71.821,28 r270 top (schematic designator C1315)
C1316_1 "10n/100V" CAPC1608X08N 127.701,28 r270 top (schematic designator C1316)
C1316_2 "10n/100V" CAPC1608X08N 74.361,28 r270 top (schematic designator C1316)
C1317_1 "10n/100V" CAPC1608X08N 130.241,28 r270 top (schematic designator C1317)
C1317_2 "10n/100V" CAPC1608X08N 76.901,28 r270 top (schematic designator C1317)
C1318_1 "10n/100V" CAPC1608X08N 118.811,36.89 r0 top (schematic designator C1318)
C1318_2 "10n/100V" CAPC1608X08N 65.471,36.89 r0 top (schematic designator C1318)
C1319_1 "10n/100V" CAPC1608X08N 121.371,35.315 r0 top (schematic designator C1319)
C1319_2 "10n/100V" CAPC1608X08N 68.031,35.315 r0 top (schematic designator C1319)
C1320_1 "10n/100V" CAPC1608X08N 123.891,36.89 r0 top (schematic designator C1320)
C1320_2 "10n/100V" CAPC1608X08N 70.551,36.89 r0 top (schematic designator C1320)
C1321_1 "10n/100V" CAPC1608X08N 126.451,35.315 r0 top (schematic designator C1321)
C1321_2 "10n/100V" CAPC1608X08N 73.111,35.315 r0 top (schematic designator C1321)
C1322_1 "10n/100V" CAPC1608X08N 128.971,36.89 r0 top (schematic designator C1322)
C1322_2 "10n/100V" CAPC1608X08N 75.631,36.89 r0 top (schematic designator C1322)
C1323_1 "10n/100V" CAPC1608X08N 131.531,35.315 r0 top (schematic designator C1323)
C1323_2 "10n/100V" CAPC1608X08N 78.191,35.315 r0 top (schematic designator C1323)
C1324_1 "10n/100V" CAPC1608X08N 102.321,28.012 r270 top (schematic designator C1324)
C1324_2 "10n/100V" CAPC1608X08N 48.981,28.012 r270 top (schematic designator C1324)
C1325_1 "10n/100V" CAPC1608X08N 104.861,28.012 r270 top (schematic designator C1325)
C1325_2 "10n/100V" CAPC1608X08N 51.521,28.012 r270 top (schematic designator C1325)
C1326_1 "10n/100V" CAPC1608X08N 107.401,28.012 r270 top (schematic designator C1326)
C1326_2 "10n/100V" CAPC1608X08N 54.061,28.012 r270 top (schematic designator C1326)
C1327_1 "10n/100V" CAPC1608X08N 109.941,28.012 r270 top (schematic designator C1327)
C1327_2 "10n/100V" CAPC1608X08N 56.601,28.012 r270 top (schematic designator C1327)
C1328_1 "10n/100V" CAPC1608X08N 112.481,28.012 r270 top (schematic designator C1328)
C1328_2 "10n/100V" CAPC1608X08N 59.141,28.012 r270 top (schematic designator C1328)
C1329_1 "10n/100V" CAPC1608X08N 115.021,28.012 r270 top (schematic designator C1329)
C1329_2 "10n/100V" CAPC1608X08N 61.681,28.012 r270 top (schematic designator C1329)
C1330_1 "10n/100V" CAPC1608X08N 103.591,36.902 r0 top (schematic designator C1330)
C1330_2 "10n/100V" CAPC1608X08N 50.251,36.902 r0 top (schematic designator C1330)
C1331_1 "10n/100V" CAPC1608X08N 106.131,35.315 r0 top (schematic designator C1331)
C1331_2 "10n/100V" CAPC1608X08N 52.791,35.315 r0 top (schematic designator C1331)
C1332_1 "10n/100V" CAPC1608X08N 108.671,36.902 r0 top (schematic designator C1332)
C1332_2 "10n/100V" CAPC1608X08N 55.331,36.902 r0 top (schematic designator C1332)
C1333_1 "10n/100V" CAPC1608X08N 111.211,35.315 r0 top (schematic designator C1333)
C1333_2 "10n/100V" CAPC1608X08N 57.871,35.315 r0 top (schematic designator C1333)
C1334_1 "10n/100V" CAPC1608X08N 113.751,36.902 r0 top (schematic designator C1334)
C1334_2 "10n/100V" CAPC1608X08N 60.411,36.902 r0 top (schematic designator C1334)
C1335_1 "10n/100V" CAPC1608X08N 116.291,35.315 r0 top (schematic designator C1335)
C1335_2 "10n/100V" CAPC1608X08N 62.951,35.315 r0 top (schematic designator C1335)
C1400_1 "100n/200V" CAPC3216X18N 124.546,54.682 r90 top locked (schematic designator C1400)
C1400_2 "100n/200V" CAPC3216X18N 70.571,54.682 r90 top (schematic designator C1400)
C1401_1 "1u/50V" CAPC2012X14N 137.136,54.047 r270 top (schematic designator C1401)
C1401_2 "1u/50V" CAPC2012X14N 84.223,54.047 r270 top (schematic designator C1401)
C1402_1 "1u/50V" CAPC2012X14N 135.277,54.047 r270 top (schematic designator C1402)
C1402_2 "1u/50V" CAPC2012X14N 82.318,54.047 r270 top (schematic designator C1402)
C1403_1 "1u/50V" CAPC2012X14N 133.499,54.047 r270 top locked (schematic designator C1403)
C1403_2 "1u/50V" CAPC2012X14N 80.413,54.047 r270 top locked (schematic designator C1403)
C1404_1 "100p/50V" CAPC1608X08N 33.741,24.837 r270 top (schematic designator C1404)
C1404_2 "100p/50V" CAPC1608X08N 17.866,24.837 r270 top (schematic designator C1404)
C1405_1 "100p/50V" CAPC1608X08N 32.153,24.837 r270 top (schematic designator C1405)
C1405_2 "100p/50V" CAPC1608X08N 16.278,24.837 r270 top locked (schematic designator C1405)
D900 "DFLS1100-7" DIOD-POWERDI123-2_V 1.356,17.217 r90 top locked
D901 "PDS3200" PowerDI5 36.598,86.115 r0 top locked
D1100 "BAT54C,215" NXP-SOT23-3_V 95.633,49.59 r180 top
D1400_1 "DFLS1100-7" DIOD-POWERDI123-2_V 100.098,31.822 r90 top (schematic designator D1400)
D1400_2 "DFLS1100-7" DIOD-POWERDI123-2_V 46.758,31.822 r90 top (schematic designator D1400)
D1401_1 "SMAJ85A-E3/61" VISH-DO-214AC-2_L 120.101,54.682 r270 top (schematic designator D1401)
D1401_2 "SMAJ85A-E3/61" VISH-DO-214AC-2_L 65.808,54.682 r270 top (schematic designator D1401)
Designator5 "Comment" Hole_3.2_Iso 150.006,-0.008 r0 top locked
Designator6 "Comment" Hole_3.2_Iso 0.006,89.992 r0 top locked
Designator7 "Comment" Hole_3.2_Iso 150.006,89.992 r0 top locked
Designator8 "Comment" Hole_3.2_Iso 0.006,-0.008 r0 top locked
Designator11 "Comment" Fiducial_2 5.006,89.992 r0 top
Designator12 "Comment" Fiducial_2 150.006,4.992 r0 top
F300 "fuse_0.5A_0448.500MR" LITTLEFUSE_448 107.381,12.442 r90 top locked
F304 "fuse_0.25A_0466.250NR" LITTLEFUSE_466 116.291,14.995 r90 top locked
F305 "fuse_0.25A_0466.250NR" LITTLEFUSE_466 118.196,9.915 r90 top locked
F306 "fuse_0.25A_0466.250NR" LITTLEFUSE_466 120.101,14.995 r90 top locked
F307 "fuse_0.25A_0466.250NR" LITTLEFUSE_466 122.006,9.915 r90 top locked
F308 "fuse_0.25A_0466.250NR" LITTLEFUSE_466 123.911,14.995 r90 top locked
F309 "fuse_0.25A_0466.250NR" LITTLEFUSE_466 125.816,9.915 r90 top locked
F310 "fuse_0.25A_0466.250NR" LITTLEFUSE_466 127.721,14.995 r90 top locked
F311 "fuse_0.25A_0466.250NR" LITTLEFUSE_466 129.626,9.915 r90 top locked
F312 "fuse_0.25A_0466.250NR" LITTLEFUSE_466 131.531,14.995 r90 top locked
F313 "fuse_0.25A_0466.250NR" LITTLEFUSE_466 133.436,9.915 r90 top locked
F314 "fuse_0.25A_0466.250NR" LITTLEFUSE_466 135.341,14.995 r90 top locked
F315 "fuse_0.25A_0466.250NR" LITTLEFUSE_466 137.246,9.915 r90 top locked
F316 "fuse_0.25A_0466.250NR" LITTLEFUSE_466 139.151,14.995 r90 top locked
F317 "fuse_0.25A_0466.250NR" LITTLEFUSE_466 141.056,9.915 r90 top locked
F318 "fuse_0.25A_0466.250NR" LITTLEFUSE_466 142.961,14.995 r90 top locked
F319 "fuse_0.25A_0466.250NR" LITTLEFUSE_466 144.866,9.915 r90 top locked
F320 "fuse_0.5A_0448.500MR" LITTLEFUSE_448 148.041,12.455 r90 top locked
F900 "fuse_1.25A_04661.25NR" LITTLEFUSE_466 1.336,12.455 r90 top locked
IC100_1 "ADG728BRUZ" ADI-RU-16_M 92.32,17.217 r180 top locked (schematic designator IC100)
IC100_2 "ADG728BRUZ" ADI-RU-16_M 63.745,17.217 r180 top locked (schematic designator IC100)
IC101_1 "ADG728BRUZ" ADI-RU-16_M 3.896,60.08 r180 top (schematic designator IC101)
IC101_2 "ADG728BRUZ" ADI-RU-16_M 3.896,52.46 r180 top (schematic designator IC101)
IC104_1 "ADG728BRUZ" ADI-RU-16_M 14.056,60.08 r180 top (schematic designator IC104)
IC104_2 "ADG728BRUZ" ADI-RU-16_M 14.056,52.46 r180 top (schematic designator IC104)
IC800_1 "MCP9800A0T-M/OT" SOT-23-OT5_L 96.606,42.617 r270 top locked (schematic designator IC800)
IC800_2 "MCP9800A0T-M/OT" SOT-23-OT5_L 41.043,42.617 r270 top locked (schematic designator IC800)
IC801_1 "M24M02-DWMN3TP/K" SOIC127P600X175-8N 145.183,43.411 r270 top (schematic designator IC801)
IC801_2 "M24M02-DWMN3TP/K" SOIC127P600X175-8N 92.141,43.672 r270 top (schematic designator IC801)
IC900 "LT8302HS8E#PBF" LT-S8E-8_V 11.198,79.765 r0 top locked
IC1400_1 "LTC6813HLWE-1#3ZZPBF" TSQFP50P1200X1200X160_HS-65N 131.213,44.84 r0 top (schematic designator IC1400)
IC1400_2 "LTC6813HLWE-1#3ZZPBF" TSQFP50P1200X1200X160_HS-65N 77.873,44.84 r0 top locked (schematic designator IC1400)
L600_1 "220µH" TYS6045221M-10 117.434,47.697 r0 top (schematic designator L600)
L600_2 "220µH" TYS6045221M-10 62.824,47.697 r0 top locked (schematic designator L600)
L900 "74404042100" "WE-LQS 4018" 2.15,69.922 r180 top
LD1400_1 "green" LEDC1608X07N 133.436,58.81 r0 top locked (schematic designator LD1400)
LD1400_2 "green" LEDC1608X07N 79.778,58.81 r0 top locked (schematic designator LD1400)
Q600_1 "PBSS4112PANP" PBSS4112PANP 100.098,39.125 r180 top (schematic designator Q600)
Q600_2 "PBSS4112PANP" PBSS4112PANP 45.488,38.807 r180 top (schematic designator Q600)
R100_1 "10k" RESC1608X05N 81.259,7.053 r180 top locked (schematic designator R100)
R100_2 "10k" RESC1608X05N 52.637,7.027 r180 top locked (schematic designator R100)
R101_1 "10k" RESC1608X05N 84.259,7.053 r180 top locked (schematic designator R101)
R101_2 "10k" RESC1608X05N 55.637,7.027 r180 top locked (schematic designator R101)
R102_1 "10k" RESC1608X05N 87.259,7.053 r180 top locked (schematic designator R102)
R102_2 "10k" RESC1608X05N 58.637,7.027 r180 top locked (schematic designator R102)
R103_1 "10k" RESC1608X05N 90.259,7.053 r180 top locked (schematic designator R103)
R103_2 "10k" RESC1608X05N 61.637,7.027 r180 top locked (schematic designator R103)
R104_1 "10k" RESC1608X05N 93.259,7.053 r180 top locked (schematic designator R104)
R104_2 "10k" RESC1608X05N 64.637,7.027 r180 top locked (schematic designator R104)
R105_1 "10k" RESC1608X05N 96.259,7.053 r180 top locked (schematic designator R105)
R105_2 "10k" RESC1608X05N 67.637,7.027 r180 top locked (schematic designator R105)
R106_1 "10k" RESC1608X05N 99.259,7.053 r180 top locked (schematic designator R106)
R106_2 "10k" RESC1608X05N 70.637,7.027 r180 top locked (schematic designator R106)
R107_1 "10k" RESC1608X05N 102.259,7.053 r180 top locked (schematic designator R107)
R107_2 "10k" RESC1608X05N 73.637,7.027 r180 top locked (schematic designator R107)
R108_1 "100R" RESC1608X05N 99.94,19.598 r0 top (schematic designator R108)
R108_2 "100R" RESC1608X05N 71.365,19.598 r0 top (schematic designator R108)
R109_1 "100R" RESC1608X05N 20.723,61.032 r0 top locked (schematic designator R109)
R109_2 "100R" RESC1608X05N 20.703,53.717 r0 top locked (schematic designator R109)
R110_1 "0R" RESC1608X05N 100.255,13.339 r180 top (schematic designator R110)
R110_2 "0R" RESC1608X05N 71.68,13.248 r180 top (schematic designator R110)
R111_1 "0R" RESC1608X05N 24.851,57.93 r270 top (schematic designator R111)
R111_2 "0R" RESC1608X05N 19.453,48.65 r180 top (schematic designator R111)
R112_1 "100R" RESC1608X05N 98.035,9.28 r270 top (schematic designator R112)
R112_2 "100R" RESC1608X05N 69.46,9.28 r270 top (schematic designator R112)
R113_1 "100R" RESC1608X05N 96.447,9.28 r270 top (schematic designator R113)
R113_2 "100R" RESC1608X05N 67.872,9.28 r270 top (schematic designator R113)
R114_1 "100R" RESC1608X05N 94.86,9.28 r270 top (schematic designator R114)
R114_2 "100R" RESC1608X05N 66.285,9.28 r270 top (schematic designator R114)
R115_1 "100R" RESC1608X05N 93.272,9.28 r270 top (schematic designator R115)
R115_2 "100R" RESC1608X05N 64.697,9.28 r270 top (schematic designator R115)
R116_1 "100R" RESC1608X05N 91.685,9.28 r270 top (schematic designator R116)
R116_2 "100R" RESC1608X05N 63.11,9.28 r270 top (schematic designator R116)
R117_1 "100R" RESC1608X05N 90.097,9.28 r270 top (schematic designator R117)
R117_2 "100R" RESC1608X05N 61.522,9.28 r270 top (schematic designator R117)
R118_1 "100R" RESC1608X05N 88.51,9.28 r270 top (schematic designator R118)
R118_2 "100R" RESC1608X05N 59.935,9.28 r270 top (schematic designator R118)
R119_1 "100R" RESC1608X05N 86.922,9.28 r270 top (schematic designator R119)
R119_2 "100R" RESC1608X05N 58.347,9.28 r270 top (schematic designator R119)
R600_1 "124k" RESC1608X05N 102.321,44.84 r90 top locked (schematic designator R600)
R600_2 "124k" RESC1608X05N 47.711,44.84 r90 top locked (schematic designator R600)
R601_1 "10k" RESC1608X05N 104.861,42.617 r0 top locked (schematic designator R601)
R601_2 "10k" RESC1608X05N 50.251,42.617 r0 top locked (schematic designator R601)
R602_1 "1k5" RESC1608X05N 117.243,43.57 r180 top locked (schematic designator R602)
R602_2 "1k5" RESC1608X05N 62.633,43.57 r180 top locked (schematic designator R602)
R603_1 "1k" RESC1608X05N 114.386,43.57 r180 top (schematic designator R603)
R603_2 "1k" RESC1608X05N 59.776,43.57 r180 top (schematic designator R603)
R604_1 "1R" RESC2012X05N 122.396,46.038 r270 top (schematic designator R604)
R604_2 "1R" RESC2012X05N 67.65,46.11 r270 top locked (schematic designator R604)
R605_1 "10k" RESC1608X05N 103.591,39.125 r90 top (schematic designator R605)
R605_2 "10k" RESC1608X05N 48.981,38.807 r90 top (schematic designator R605)
R606_1 "124k" RESC1608X05N 102.321,39.125 r90 top (schematic designator R606)
R606_2 "124k" RESC1608X05N 47.711,38.807 r90 top (schematic designator R606)
R607_1 "10k" RESC1608X05N 96.606,39.125 r90 top (schematic designator R607)
R607_2 "10k" RESC1608X05N 41.993,38.807 r90 top (schematic designator R607)
R608_1 "68k" RESC1608X05N 99.146,37.22 r180 top (schematic designator R608)
R608_2 "68k" RESC1608X05N 43.901,36.585 r180 top (schematic designator R608)
R609_1 "0R" RESC1608X05N 100.098,41.03 r180 top (schematic designator R609)
R609_2 "0R" RESC1608X05N 45.488,40.712 r180 top (schematic designator R609)
R610_1 "0R" RESC1608X05N 104.861,40.712 r270 top (schematic designator R610)
R610_2 "0R" RESC1608X05N 50.251,40.712 r270 top (schematic designator R610)
R700_1 "10k" RESC1608X05N 86.996,17.853 r90 top locked (schematic designator R700)
R700_2 "10k" RESC1608X05N 58.323,17.827 r90 top locked (schematic designator R700)
R701_1 "10k" RESC1608X05N 85.408,17.853 r90 top locked (schematic designator R701)
R701_2 "10k" RESC1608X05N 56.736,17.827 r90 top locked (schematic designator R701)
R702_1 "10k" RESC1608X05N 83.821,17.853 r90 top locked (schematic designator R702)
R702_2 "10k" RESC1608X05N 55.148,17.827 r90 top locked (schematic designator R702)
R703_1 "10k" RESC1608X05N 82.233,17.853 r90 top locked (schematic designator R703)
R703_2 "10k" RESC1608X05N 53.561,17.827 r90 top locked (schematic designator R703)
R704_1 "10k" RESC1608X05N 80.646,17.853 r90 top locked (schematic designator R704)
R704_2 "10k" RESC1608X05N 51.973,17.827 r90 top locked (schematic designator R704)
R705_1 "10k" RESC1608X05N 79.058,17.853 r90 top locked (schematic designator R705)
R705_2 "10k" RESC1608X05N 50.386,17.827 r90 top locked (schematic designator R705)
R706_1 "10k" RESC1608X05N 77.471,17.853 r90 top locked (schematic designator R706)
R706_2 "10k" RESC1608X05N 48.798,17.827 r90 top locked (schematic designator R706)
R707_1 "10k" RESC1608X05N 75.883,17.853 r90 top locked (schematic designator R707)
R707_2 "10k" RESC1608X05N 47.211,17.827 r90 top locked (schematic designator R707)
R708_1 "10k" RESC1608X05N 83.906,10.55 r90 top locked (schematic designator R708)
R708_2 "10k" RESC1608X05N 54.537,11.343 r90 top locked (schematic designator R708)
R800_1 "10k" RESC1608X05N 96.288,45.475 r0 top (schematic designator R800)
R800_2 "10k" RESC1608X05N 41.043,45.475 r0 top (schematic designator R800)
R801_1 "10k" RESC1608X05N 147.565,37.505 r0 top (schematic designator R801)
R801_2 "10k" RESC1608X05N 94.363,37.537 r0 top locked (schematic designator R801)
R900 "390k" RESC1608X05N 6.436,81.987 r180 top
R901 "86k6" RESC1608X05N 6.436,83.575 r0 top
R902 "115k" RESC1608X05N 15.326,81.352 r270 top
R903 "39R" RESC2012X05N 14.373,87.385 r180 top locked
R904 "220k" RESC1608X05N 15.326,78.495 r270 top
R905 "10k" RESC1608X05N 13.103,83.575 r0 top
R1100 "150R" RESC1608X05N 100.733,61.337 r270 top
R1101 "150R" RESC1608X05N 103.273,61.337 r270 top
R1102 "150R" RESC1608X05N 124.546,62.872 r270 top
R1103 "150R" RESC1608X05N 130.261,62.872 r270 top
R1104 "150R" RESC1608X05N 135.976,62.872 r270 top
R1105 "150R" RESC1608X05N 141.691,62.872 r270 top
R1106 "150R" RESC1608X05N 78.826,62.872 r270 top
R1107 "150R" RESC1608X05N 84.541,62.872 r270 top
R1108 "150R" RESC1608X05N 90.256,62.872 r270 top
R1109 "150R" RESC1608X05N 94.241,62.872 r270 top
R1110 "150R" RESC1608X05N 95.648,61.35 r270 top
R1111 "150R" RESC1608X05N 98.193,61.337 r270 top
R1112 "150R" RESC1608X05N 34.058,61.35 r270 top
R1113 "150R" RESC1608X05N 37.233,61.35 r270 top
R1114 "150R" RESC1608X05N 40.408,61.337 r270 top
R1115 "150R" RESC1608X05N 43.583,61.35 r270 top
R1116 "150R" RESC1608X05N 46.758,61.35 r270 top
R1117 "150R" RESC1608X05N 49.933,61.35 r270 top
R1118 "10k" RESC1608X05N 117.693,55.635 r90 top
R1300_1 "100R" RESC1608X05N 131.511,24.825 r90 top (schematic designator R1300)
R1300_2 "100R" RESC1608X05N 78.171,24.825 r90 top (schematic designator R1300)
R1301_1 "100R" RESC1608X05N 134.051,24.825 r90 top (schematic designator R1301)
R1301_2 "100R" RESC1608X05N 80.711,24.825 r90 top (schematic designator R1301)
R1302_1 "100R" RESC1608X05N 136.591,24.825 r90 top (schematic designator R1302)
R1302_2 "100R" RESC1608X05N 83.251,24.825 r90 top (schematic designator R1302)
R1303_1 "100R" RESC1608X05N 139.131,24.825 r90 top (schematic designator R1303)
R1303_2 "100R" RESC1608X05N 85.791,24.825 r90 top (schematic designator R1303)
R1304_1 "100R" RESC1608X05N 141.671,24.825 r90 top (schematic designator R1304)
R1304_2 "100R" RESC1608X05N 88.331,24.825 r90 top (schematic designator R1304)
R1305_1 "100R" RESC1608X05N 144.211,24.825 r90 top (schematic designator R1305)
R1305_2 "100R" RESC1608X05N 90.871,24.825 r90 top (schematic designator R1305)
R1306_1 "100R" RESC1608X05N 146.751,24.825 r90 top (schematic designator R1306)
R1306_2 "100R" RESC1608X05N 93.411,24.825 r90 top (schematic designator R1306)
R1307_1 "100R" RESC1608X05N 116.271,24.825 r90 top (schematic designator R1307)
R1307_2 "100R" RESC1608X05N 62.931,24.825 r90 top (schematic designator R1307)
R1308_1 "100R" RESC1608X05N 118.811,24.825 r90 top (schematic designator R1308)
R1308_2 "100R" RESC1608X05N 65.471,24.825 r90 top (schematic designator R1308)
R1309_1 "100R" RESC1608X05N 121.351,24.825 r90 top (schematic designator R1309)
R1309_2 "100R" RESC1608X05N 68.011,24.825 r90 top (schematic designator R1309)
R1310_1 "100R" RESC1608X05N 123.891,24.825 r90 top (schematic designator R1310)
R1310_2 "100R" RESC1608X05N 70.551,24.825 r90 top (schematic designator R1310)
R1311_1 "100R" RESC1608X05N 126.431,24.825 r90 top (schematic designator R1311)
R1311_2 "100R" RESC1608X05N 73.091,24.825 r90 top (schematic designator R1311)
R1312_1 "100R" RESC1608X05N 128.971,24.825 r90 top (schematic designator R1312)
R1312_2 "100R" RESC1608X05N 75.631,24.825 r90 top (schematic designator R1312)
R1313_1 "100R" RESC1608X05N 101.051,24.837 r90 top (schematic designator R1313)
R1313_2 "100R" RESC1608X05N 47.711,24.837 r90 top (schematic designator R1313)
R1314_1 "100R" RESC1608X05N 103.591,24.837 r90 top (schematic designator R1314)
R1314_2 "100R" RESC1608X05N 50.251,24.837 r90 top (schematic designator R1314)
R1315_1 "100R" RESC1608X05N 106.131,24.837 r90 top (schematic designator R1315)
R1315_2 "100R" RESC1608X05N 52.791,24.837 r90 top (schematic designator R1315)
R1316_1 "100R" RESC1608X05N 108.671,24.837 r90 top (schematic designator R1316)
R1316_2 "100R" RESC1608X05N 55.331,24.837 r90 top (schematic designator R1316)
R1317_1 "100R" RESC1608X05N 111.211,24.837 r90 top (schematic designator R1317)
R1317_2 "100R" RESC1608X05N 57.871,24.837 r90 top (schematic designator R1317)
R1318_1 "100R" RESC1608X05N 113.751,24.837 r90 top (schematic designator R1318)
R1318_2 "100R" RESC1608X05N 60.411,24.837 r90 top (schematic designator R1318)
R1400_1 "1k2" RESC1608X05N 128.991,53.83 r90 top locked (schematic designator R1400)
R1400_2 "1k2" RESC1608X05N 75.333,53.78 r90 top locked (schematic designator R1400)
R1401_1 "100R" RESC2012X05N 122.641,54.682 r270 top (schematic designator R1401)
R1401_2 "100R" RESC2012X05N 68.666,54.682 r270 top locked (schematic designator R1401)
R1402_1 "820R" RESC1608X05N 130.502,53.83 r270 top locked (schematic designator R1402)
R1402_2 "820R" RESC1608X05N 76.921,53.78 r270 top locked (schematic designator R1402)
R1403_1 "270R" RESC1608X05N 130.786,58.81 r0 top (schematic designator R1403)
R1403_2 "270R" RESC1608X05N 77.08,58.81 r0 top (schematic designator R1403)
R1404_1 "1M" RESC1608X05N 131.936,53.83 r90 top locked (schematic designator R1404)
R1404_2 "1M" RESC1608X05N 78.508,53.78 r90 top locked (schematic designator R1404)
R1405_1 "120R" RESC1608X05N 35.963,24.202 r0 top (schematic designator R1405)
R1405_2 "120R" RESC1608X05N 20.088,24.202 r0 top (schematic designator R1405)
R1406_1 "0R" RESC1608X05N 127.086,53.73 r90 top locked (schematic designator R1406)
R1406_2 "0R" RESC1608X05N 73.428,53.78 r90 top locked (schematic designator R1406)
R1407_1 "0R" RESC1608X05N 127.086,56.428 r90 top (schematic designator R1407)
R1407_2 "0R" RESC1608X05N 73.428,56.428 r90 top (schematic designator R1407)
R1408_1 "0R" RESC1608X05N 140.738,56.111 r180 top (schematic designator R1408)
R1408_2 "0R" RESC1608X05N 87.398,56.111 r180 top (schematic designator R1408)
R1409_1 "0R" RESC1608X05N 140.738,53.253 r180 top locked (schematic designator R1409)
R1409_2 "0R" RESC1608X05N 87.398,53.253 r180 top locked (schematic designator R1409)
R1410_1 "0R" RESC1608X05N 140.738,51.507 r180 top locked (schematic designator R1410)
R1410_2 "0R" RESC1608X05N 87.398,51.507 r180 top locked (schematic designator R1410)
R1411_1 "0R" RESC1608X05N 140.738,50.332 r180 top (schematic designator R1411)
R1411_2 "0R" RESC1608X05N 87.398,50.078 r180 top locked (schematic designator R1411)
R1412_1 "0R" RESC1608X05N 140.738,48.332 r180 top locked (schematic designator R1412)
R1412_2 "0R" RESC1608X05N 87.398,48.332 r180 top locked (schematic designator R1412)
R1413_1 "0R" RESC1608X05N 140.738,46.903 r180 top locked (schematic designator R1413)
R1413_2 "0R" RESC1608X05N 87.398,46.903 r180 top locked (schematic designator R1413)
R1414_1 "0R" RESC1608X05N 140.738,44.998 r180 top locked (schematic designator R1414)
R1414_2 "0R" RESC1608X05N 87.398,45.157 r180 top locked (schematic designator R1414)
R1415_1 "0R" RESC1608X05N 140.738,43.57 r180 top locked (schematic designator R1415)
R1415_2 "0R" RESC1608X05N 87.398,43.728 r180 top locked (schematic designator R1415)
R1416_1 "0R" RESC1608X05N 140.738,41.907 r180 top locked (schematic designator R1416)
R1416_2 "0R" RESC1608X05N 87.378,41.962 r180 top locked (schematic designator R1416)
R1417_1 "0R" RESC1608X05N 140.738,40.395 r180 top locked (schematic designator R1417)
R1417_2 "0R" RESC1608X05N 87.378,40.597 r180 top locked (schematic designator R1417)
R1418_1 "120R" RESC1608X05N 29.931,24.202 r0 top (schematic designator R1418)
R1418_2 "120R" RESC1608X05N 14.056,24.202 r0 top (schematic designator R1418)
R1419_1 "1k2" RESC1608X05N 143.278,48.491 r90 top (schematic designator R1419)
R1419_2 "1k2" RESC1608X05N 90.141,48.726 r90 top (schematic designator R1419)
R1420_1 "1k2" RESC1608X05N 145.342,48.491 r90 top (schematic designator R1420)
R1420_2 "1k2" RESC1608X05N 92.228,48.729 r90 top (schematic designator R1420)
R1421_1 "10k" RESC1608X05N 149.692,42.871 r90 top (schematic designator R1421)
R1421_2 "10k" RESC1608X05N 69.936,48.713 r180 top (schematic designator R1421)
R1422_1 "10k" RESC1608X05N 149.692,46.237 r90 top (schematic designator R1422)
R1422_2 "10k" RESC1608X05N 69.936,50.11 r180 top (schematic designator R1422)
R1423_1 "10k" RESC1608X05N 147.438,47.657 r180 top (schematic designator R1423)
R1423_2 "10k" RESC1608X05N 69.936,51.507 r180 top (schematic designator R1423)
R1424_1 "10k" RESC1608X05N 147.438,49.191 r180 top (schematic designator R1424)
R1424_2 "10k" RESC1608X05N 84.731,50.444 r90 top (schematic designator R1424)
R1425_1 "10k" RESC1608X05N 10.754,25.853 r90 top (schematic designator R1425)
R1425_2 "10k" RESC1608X05N 5.293,25.853 r90 top (schematic designator R1425)
R1426_1 "10k" RESC1608X05N 9.357,25.853 r90 top (schematic designator R1426)
R1426_2 "10k" RESC1608X05N 3.896,25.853 r90 top (schematic designator R1426)
R1427_1 "10k" RESC1608X05N 7.96,25.853 r90 top (schematic designator R1427)
R1427_2 "10k" RESC1608X05N 2.499,25.853 r90 top (schematic designator R1427)
R1500 "130R" RESC5025X07N 112.511,74.367 r270 top
R1501 "130R" RESC5025X07N 118.196,74.367 r270 top
R1502 "130R" RESC5025X07N 123.911,74.367 r270 top
R1503 "130R" RESC5025X07N 129.626,74.367 r270 top
R1504 "130R" RESC5025X07N 135.341,74.367 r270 top
R1505 "130R" RESC5025X07N 141.056,74.367 r270 top
R1506 "130R" RESC5025X07N 112.481,85.797 r90 top locked
R1507 "130R" RESC5025X07N 118.196,85.797 r90 top locked
R1508 "130R" RESC5025X07N 123.911,85.797 r90 top
R1509 "130R" RESC5025X07N 129.626,85.797 r90 top locked
R1510 "130R" RESC5025X07N 135.321,85.797 r90 top locked
R1511 "130R" RESC5025X07N 141.056,85.797 r90 top locked
R1512 "3k3" RESC1608X05N 110.258,65.477 r270 top locked
R1513 "3k3" RESC1608X05N 115.973,65.477 r270 top locked
R1514 "3k3" RESC1608X05N 121.688,65.477 r270 top locked
R1515 "3k3" RESC1608X05N 127.403,65.477 r270 top locked
R1516 "3k3" RESC1608X05N 133.118,65.477 r270 top locked
R1517 "3k3" RESC1608X05N 138.924,65.477 r270 top
R1518 "130R" RESC5025X07N 78.191,74.367 r270 top
R1519 "130R" RESC5025X07N 83.906,74.367 r270 top
R1520 "130R" RESC5025X07N 89.621,74.367 r270 top
R1521 "130R" RESC5025X07N 95.336,74.367 r270 top
R1522 "130R" RESC5025X07N 101.051,74.367 r270 top
R1523 "130R" RESC5025X07N 106.766,74.367 r270 top
R1524 "130R" RESC5025X07N 78.191,85.797 r90 top locked
R1525 "130R" RESC5025X07N 83.906,85.797 r90 top locked
R1526 "130R" RESC5025X07N 89.621,85.797 r90 top locked
R1527 "130R" RESC5025X07N 95.336,85.797 r90 top locked
R1528 "130R" RESC5025X07N 101.051,85.797 r90 top locked
R1529 "130R" RESC5025X07N 106.766,85.797 r90 top locked
R1530 "3k3" RESC1608X05N 75.968,65.477 r270 top locked
R1531 "3k3" RESC1608X05N 81.683,65.477 r270 top locked
R1532 "3k3" RESC1608X05N 87.398,65.477 r270 top locked
R1533 "3k3" RESC1608X05N 93.113,65.477 r270 top locked
R1534 "3k3" RESC1608X05N 98.828,65.477 r270 top locked
R1535 "3k3" RESC1608X05N 104.543,65.477 r270 top locked
R1536 "130R" RESC5025X07N 43.901,74.367 r270 top
R1537 "130R" RESC5025X07N 49.616,74.367 r270 top
R1538 "130R" RESC5025X07N 55.331,74.367 r270 top
R1539 "130R" RESC5025X07N 61.046,74.367 r270 top
R1540 "130R" RESC5025X07N 66.761,74.367 r270 top
R1541 "130R" RESC5025X07N 72.471,74.367 r270 top
R1542 "130R" RESC5025X07N 43.901,85.797 r90 top locked
R1543 "130R" RESC5025X07N 49.616,85.797 r90 top locked
R1544 "130R" RESC5025X07N 55.331,85.797 r90 top locked
R1545 "130R" RESC5025X07N 61.046,85.797 r90 top locked
R1546 "130R" RESC5025X07N 66.761,85.797 r90 top locked
R1547 "130R" RESC5025X07N 72.456,85.797 r90 top locked
R1548 "3k3" RESC1608X05N 41.678,65.477 r270 top locked
R1549 "3k3" RESC1608X05N 47.393,65.477 r270 top locked
R1550 "3k3" RESC1608X05N 53.108,65.477 r270 top locked
R1551 "3k3" RESC1608X05N 58.823,65.477 r270 top locked
R1552 "3k3" RESC1608X05N 64.538,65.477 r270 top locked
R1553 "3k3" RESC1608X05N 70.253,65.477 r270 top locked
SJ300 "0R" RESC1608X05N 107.421,7.387 r0 top
SJ301 "0R" RESC1608X05N 148.041,7.375 r0 top
T1500 "NX2301P,215" NXP-SOT23_N 113.116,66.112 r90 top
T1501 "NX2301P,215" NXP-SOT23_N 118.831,66.112 r90 top
T1502 "NX2301P,215" NXP-SOT23_N 124.546,66.112 r90 top locked
T1503 "NX2301P,215" NXP-SOT23_N 130.273,66.112 r90 top
T1504 "NX2301P,215" NXP-SOT23_N 135.976,66.112 r90 top
T1505 "NX2301P,215" NXP-SOT23_N 141.691,66.112 r90 top
T1506 "NX2301P,215" NXP-SOT23_N 78.826,66.112 r90 top
T1507 "NX2301P,215" NXP-SOT23_N 84.541,66.112 r90 top
T1508 "NX2301P,215" NXP-SOT23_N 90.256,66.112 r90 top
T1509 "NX2301P,215" NXP-SOT23_N 95.986,66.112 r90 top
T1510 "NX2301P,215" NXP-SOT23_N 101.666,66.112 r90 top
T1511 "NX2301P,215" NXP-SOT23_N 107.401,66.112 r90 top
T1512 "NX2301P,215" NXP-SOT23_N 44.536,66.112 r90 top
T1513 "NX2301P,215" NXP-SOT23_N 50.251,66.112 r90 top
T1514 "NX2301P,215" NXP-SOT23_N 55.966,66.112 r90 top
T1515 "NX2301P,215" NXP-SOT23_N 61.681,66.112 r90 top
T1516 "NX2301P,215" NXP-SOT23_N 67.396,66.112 r90 top
T1517 "NX2301P,215" NXP-SOT23_N 73.111,66.112 r90 top
TP900 "Testpoint_Square" Testpoint_S1 7.388,17.217 r90 top locked
TP901 "Testpoint_Square" Testpoint_S1 4.848,17.217 r90 top locked
TP902 "Testpoint_Square" Testpoint_S1 40.372,67.223 r90 top
TP903 "Testpoint_Square" Testpoint_S1 38.98,67.223 r90 top
TP1400_1 "Testpoint_Square" Testpoint_S1 127.403,58.81 r180 top (schematic designator TP1400)
TP1400_2 "Testpoint_Square" Testpoint_S1 73.746,58.81 r180 top (schematic designator TP1400)
TP1401_1 "Testpoint_Square" Testpoint_S1 143.893,54.206 r0 top (schematic designator TP1401)
TP1401_2 "Testpoint_Square" Testpoint_S1 90.573,54.206 r180 top (schematic designator TP1401)
TP1402_1 "Testpoint_Square" Testpoint_S1 143.913,55.635 r0 top (schematic designator TP1402)
TP1402_2 "Testpoint_Square" Testpoint_S1 90.573,55.635 r180 top (schematic designator TP1402)
TP1403_1 "Testpoint_Square" Testpoint_S1 135.976,58.81 r180 top (schematic designator TP1403)
TP1403_2 "Testpoint_Square" Testpoint_S1 82.318,58.81 r0 top (schematic designator TP1403)
TP1404_1 "Testpoint_Square" Testpoint_S1 46.441,5.946 r90 top locked (schematic designator TP1404)
TP1404_2 "Testpoint_Square" Testpoint_S1 31.518,5.946 r90 top locked (schematic designator TP1404)
TP1405_1 "Testpoint_Square" Testpoint_S1 43.596,5.946 r90 top locked (schematic designator TP1405)
TP1405_2 "Testpoint_Square" Testpoint_S1 28.393,5.946 r90 top locked (schematic designator TP1405)
TP1406_1 "Testpoint_Square" Testpoint_S1 35.963,5.946 r90 top locked (schematic designator TP1406)
TP1406_2 "Testpoint_Square" Testpoint_S1 20.723,5.946 r90 top locked (schematic designator TP1406)
TP1407_1 "Testpoint_Square" Testpoint_S1 38.98,5.946 r90 top locked (schematic designator TP1407)
TP1407_2 "Testpoint_Square" Testpoint_S1 24.196,5.946 r90 top locked (schematic designator TP1407)
TP1408_1 "Testpoint_Square" Testpoint_S1 143.913,52.777 r180 top (schematic designator TP1408)
TP1408_2 "Testpoint_Square" Testpoint_S1 90.573,52.777 r180 top locked (schematic designator TP1408)
TP1409_1 "Testpoint_Square" Testpoint_S1 143.893,51.348 r180 top (schematic designator TP1409)
TP1409_2 "Testpoint_Square" Testpoint_S1 90.573,51.348 r180 top (schematic designator TP1409)
TR900 "WE_750313457" WE_750313457 24.533,81.67 r0 top locked
TR1400_1 "HM2102NL" HM2102NL 32.947,15.63 r90 top locked (schematic designator TR1400)
TR1400_2 "HM2102NL" HM2102NL 17.072,15.63 r90 top locked (schematic designator TR1400)
U100_1 "AD8628ARTZ-R2" ADI-RJ-5_M 99.305,16.423 r270 top (schematic designator U100)
U100_2 "AD8628ARTZ-R2" ADI-RJ-5_M 70.73,16.423 r270 top locked (schematic designator U100)
U101_1 "AD8628ARTZ-R2" ADI-RJ-5_M 21.676,58.175 r0 top locked (schematic designator U101)
U101_2 "AD8628ARTZ-R2" ADI-RJ-5_M 21.676,50.872 r0 top locked (schematic designator U101)
U600_1 "LM5161QPWPRQ1" PWP0014A 107.401,46.427 r0 top (schematic designator U600)
U600_2 "LM5161QPWPRQ1" PWP0014A 52.791,46.427 r0 top (schematic designator U600)
U700_1 "TCA6408APWR" PW0016A_L 79.461,12.455 r180 top locked (schematic designator U700)
U700_2 "TCA6408APWR" PW0016A_L 50.092,13.248 r180 top locked (schematic designator U700)
U1100 "ACPL-217" SOIC127P700X220-4N 99.463,55.635 r270 top locked
U1101 "ACPL-217" SOIC127P700X220-4N 102.638,55.635 r270 top locked
U1102 "ACPL-217" SOIC127P700X220-4N 105.813,55.635 r270 top locked
U1103 "ACPL-217" SOIC127P700X220-4N 108.988,55.635 r270 top locked
U1104 "ACPL-217" SOIC127P700X220-4N 112.163,55.635 r270 top locked
U1105 "ACPL-217" SOIC127P700X220-4N 115.338,55.635 r270 top locked
U1106 "ACPL-217" SOIC127P700X220-4N 52.473,55.635 r270 top locked
U1107 "ACPL-217" SOIC127P700X220-4N 55.648,55.635 r270 top locked
U1108 "ACPL-217" SOIC127P700X220-4N 58.823,55.635 r270 top locked
U1109 "ACPL-217" SOIC127P700X220-4N 61.998,55.635 r270 top locked
U1110 "ACPL-217" SOIC127P700X220-4N 93.113,55.635 r270 top locked
U1111 "ACPL-217" SOIC127P700X220-4N 96.288,55.635 r270 top locked
U1112 "ACPL-217" SOIC127P700X220-4N 33.423,55.635 r270 top locked
U1113 "ACPL-217" SOIC127P700X220-4N 36.598,55.635 r270 top locked
U1114 "ACPL-217" SOIC127P700X220-4N 39.773,55.635 r270 top locked
U1115 "ACPL-217" SOIC127P700X220-4N 42.948,55.635 r270 top locked
U1116 "ACPL-217" SOIC127P700X220-4N 46.123,55.635 r270 top locked
U1117 "ACPL-217" SOIC127P700X220-4N 49.298,55.635 r270 top locked
X200 "690357282476" 690357282476 126.948,0.893 r180 top
X201 "690357281676" 690357281676 91.685,0.893 r180 top
x202 "690357281676" 690357281676 62.792,0.893 r180 top (schematic designator X202)
X400 "690357281876" 690357281876 14.373,35.07 r0 top
X401 "690357281876" 690357281876 14.373,43.225 r0 top
X500 "690357280476" 690357280476 44.695,0.893 r180 top
X501 "690357280476" 690357280476 34.535,0.893 r180 top
Z1300_1 "MMSZ4692T1G" ONSC-SOD-123-2-425-04_V 134.051,33.08 r0 top (schematic designator Z1300)
Z1300_2 "MMSZ4692T1G" ONSC-SOD-123-2-425-04_V 80.711,33.08 r0 top (schematic designator Z1300)
Z1301_1 "MMSZ4692T1G" ONSC-SOD-123-2-425-04_V 136.591,30.54 r0 top locked (schematic designator Z1301)
Z1301_2 "MMSZ4692T1G" ONSC-SOD-123-2-425-04_V 83.251,30.54 r0 top locked (schematic designator Z1301)
Z1302_1 "MMSZ4692T1G" ONSC-SOD-123-2-425-04_V 139.131,33.08 r0 top locked (schematic designator Z1302)
Z1302_2 "MMSZ4692T1G" ONSC-SOD-123-2-425-04_V 85.791,33.08 r0 top locked (schematic designator Z1302)
Z1303_1 "MMSZ4692T1G" ONSC-SOD-123-2-425-04_V 141.671,30.54 r0 top locked (schematic designator Z1303)
Z1303_2 "MMSZ4692T1G" ONSC-SOD-123-2-425-04_V 88.331,30.54 r0 top locked (schematic designator Z1303)
Z1304_1 "MMSZ4692T1G" ONSC-SOD-123-2-425-04_V 144.211,33.08 r0 top locked (schematic designator Z1304)
Z1304_2 "MMSZ4692T1G" ONSC-SOD-123-2-425-04_V 90.871,33.08 r0 top locked (schematic designator Z1304)
Z1305_1 "MMSZ4692T1G" ONSC-SOD-123-2-425-04_V 146.751,30.54 r0 top locked (schematic designator Z1305)
Z1305_2 "MMSZ4692T1G" ONSC-SOD-123-2-425-04_V 93.411,30.54 r0 top locked (schematic designator Z1305)
Z1306_1 "MMSZ4692T1G" ONSC-SOD-123-2-425-04_V 118.811,33.08 r0 top (schematic designator Z1306)
Z1306_2 "MMSZ4692T1G" ONSC-SOD-123-2-425-04_V 65.471,33.08 r0 top (schematic designator Z1306)
Z1307_1 "MMSZ4692T1G" ONSC-SOD-123-2-425-04_V 121.351,30.54 r0 top locked (schematic designator Z1307)
Z1307_2 "MMSZ4692T1G" ONSC-SOD-123-2-425-04_V 68.011,30.54 r0 top locked (schematic designator Z1307)
Z1308_1 "MMSZ4692T1G" ONSC-SOD-123-2-425-04_V 123.891,33.08 r0 top locked (schematic designator Z1308)
Z1308_2 "MMSZ4692T1G" ONSC-SOD-123-2-425-04_V 70.551,33.08 r0 top locked (schematic designator Z1308)
Z1309_1 "MMSZ4692T1G" ONSC-SOD-123-2-425-04_V 126.431,30.54 r0 top locked (schematic designator Z1309)
Z1309_2 "MMSZ4692T1G" ONSC-SOD-123-2-425-04_V 73.091,30.54 r0 top locked (schematic designator Z1309)
Z1310_1 "MMSZ4692T1G" ONSC-SOD-123-2-425-04_V 128.971,33.08 r0 top locked (schematic designator Z1310)
Z1310_2 "MMSZ4692T1G" ONSC-SOD-123-2-425-04_V 75.631,33.08 r0 top locked (schematic designator Z1310)
Z1311_1 "MMSZ4692T1G" ONSC-SOD-123-2-425-04_V 131.511,30.54 r0 top locked (schematic designator Z1311)
Z1311_2 "MMSZ4692T1G" ONSC-SOD-123-2-425-04_V 78.171,30.54 r0 top locked (schematic designator Z1311)
Z1312_1 "MMSZ4692T1G" ONSC-SOD-123-2-425-04_V 103.591,33.092 r0 top locked (schematic designator Z1312)
Z1312_2 "MMSZ4692T1G" ONSC-SOD-123-2-425-04_V 50.251,33.092 r0 top locked (schematic designator Z1312)
Z1313_1 "MMSZ4692T1G" ONSC-SOD-123-2-425-04_V 106.131,30.552 r0 top locked (schematic designator Z1313)
Z1313_2 "MMSZ4692T1G" ONSC-SOD-123-2-425-04_V 52.791,30.552 r0 top locked (schematic designator Z1313)
Z1314_1 "MMSZ4692T1G" ONSC-SOD-123-2-425-04_V 108.671,33.092 r0 top locked (schematic designator Z1314)
Z1314_2 "MMSZ4692T1G" ONSC-SOD-123-2-425-04_V 55.331,33.092 r0 top locked (schematic designator Z1314)